# Allegro board democ2.brd
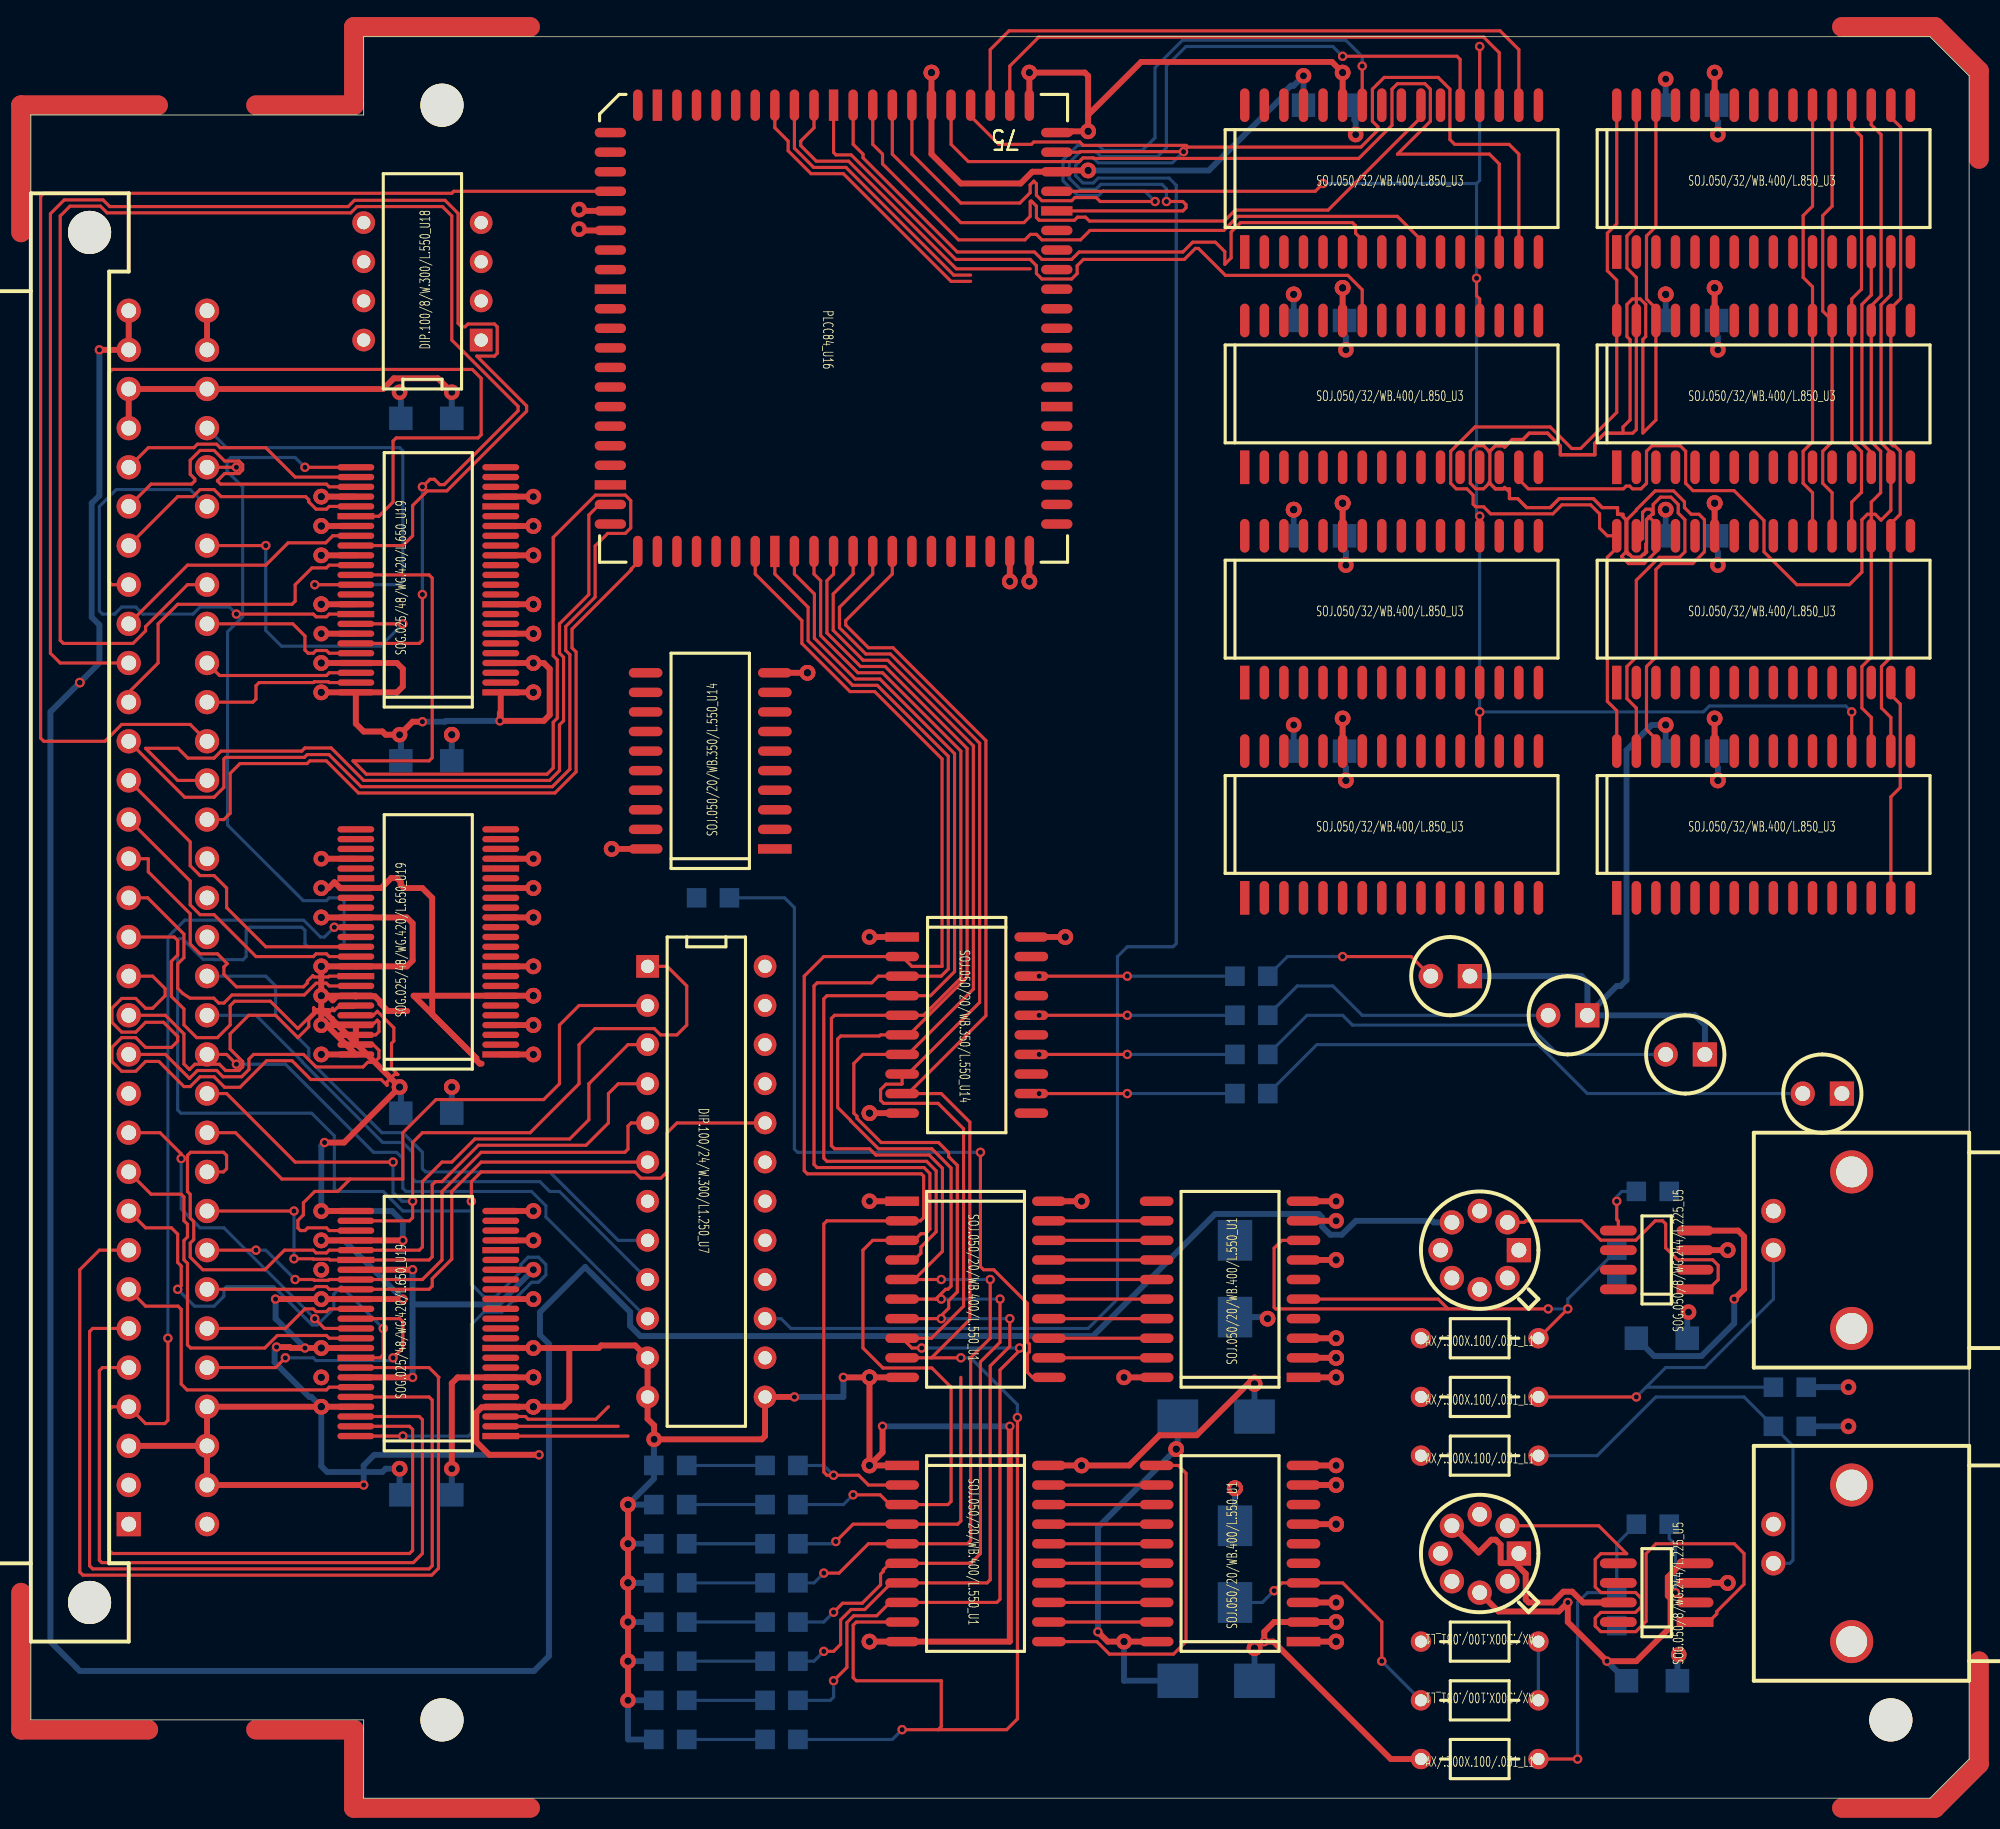
[diagram p0: board, top side]
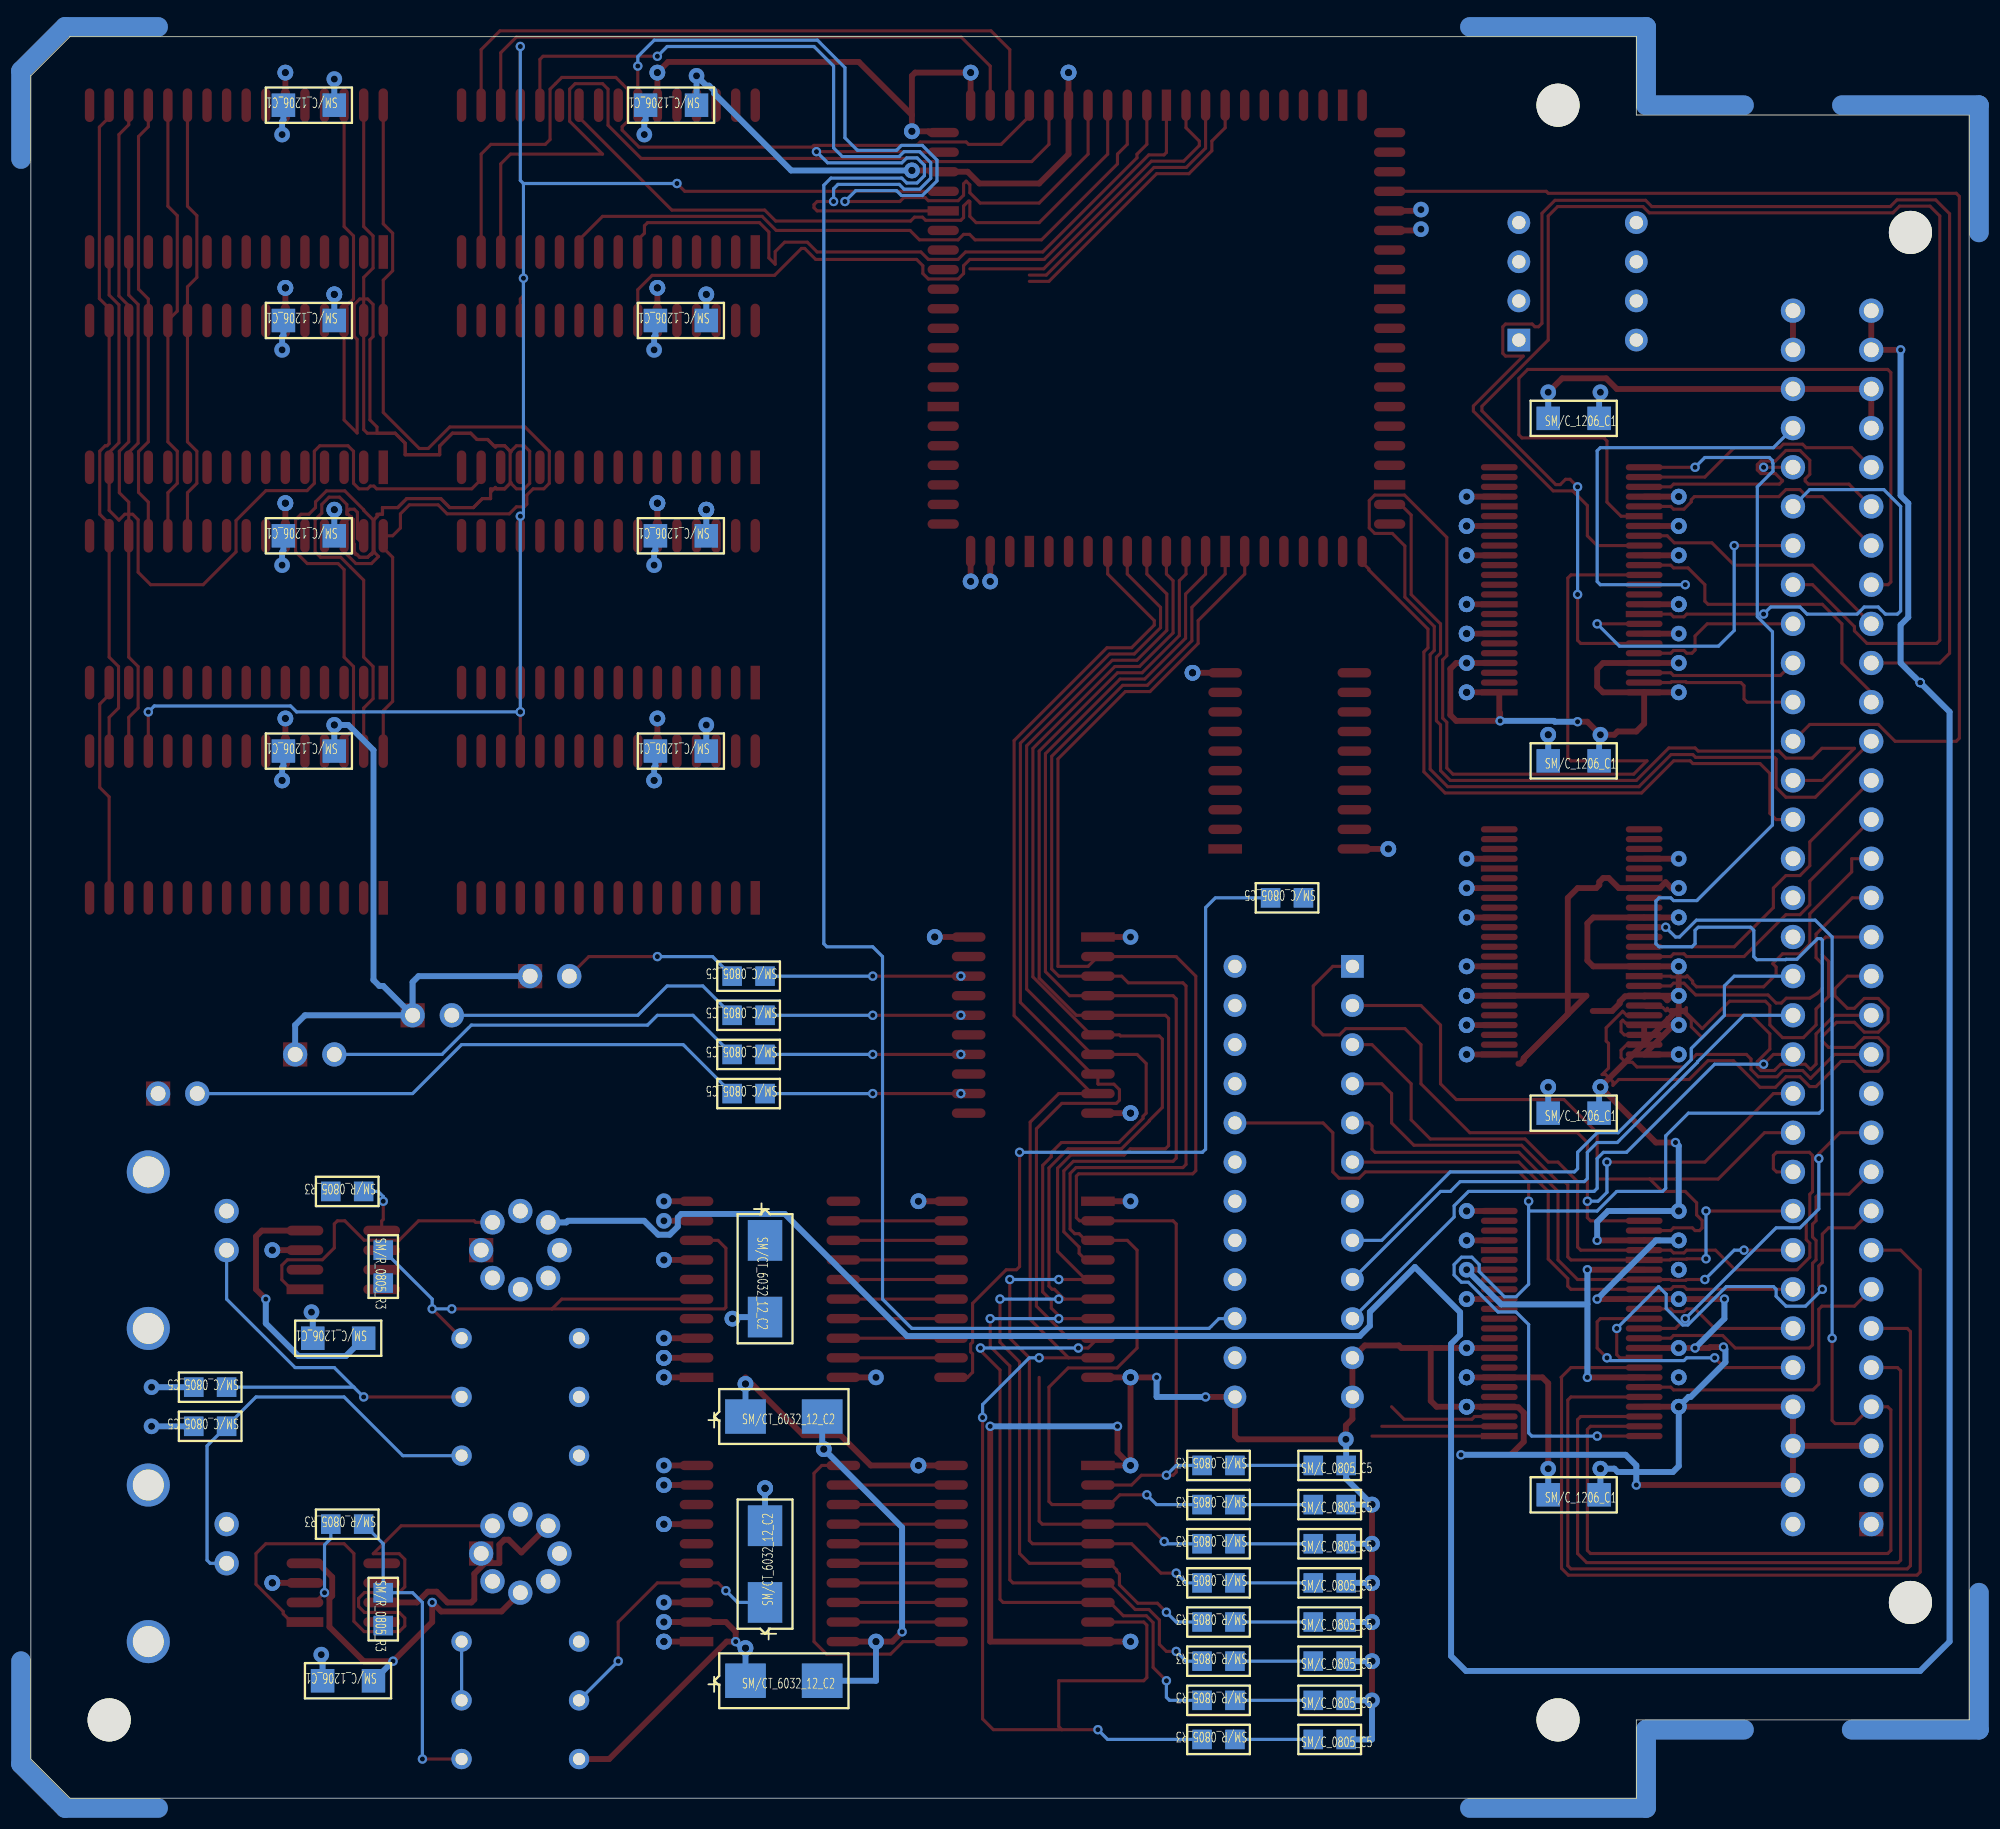
[diagram p1: board, bottom side, seen from below]

Outline 125.73 x 114.3 mm; copper layers: TOP, GND, POWER, BOTTOM. Coordinates in mm from the lower left corner of the outline.
Outline path: 0,109.22 21.59,109.22 21.59,114.3 123.19,114.3 125.73,111.76 125.73,2.54 123.19,0 21.59,0 21.59,5.08 0,5.08 0,109.22

## Design rules (mm)
nets with their own width: min track width 0.203; nets A0 A1 A2 A3 A4 A5 A6 A7 A8 A9 A10 A11 A12 A13 A14 A15 A16 A17 A18 A19 A20 A21 A22 A23 AEN/ BA0 BA1 BA2 BA3 BD0 BD1 BD2 BD3 BD4 BD5 BD6 BD7 BD8 BD9 BD10 BD11 BD12 BD13 BD14 BD15 BRD/ BRESET BWR/ D0 D1 D2 D3 D4 D5 D6 D7 D9 D10 D11 D12 D13 D14 D15 DDIR DEN/ DHEN/ FPGA/ GAIN HS/ MCLK MRD/ MWR/ N00036 N00036_6360 N00038 N00038_6372 N00044 N00044_6366 N00046 N00046_6362 N00048 N00048_6359 N00060 N00060_6368 N00306 N00318 N00322 N00671 N00689 N00703 N00717 N00827 N00831 N00835 N00837 N04966 N05690 N05692 N05694 N05696 N05698 N05700 N05702 N05704 N11940 N11950 N11984 N11994 N12004 N19706 N19710 N19714 N19718 N19934 N19938 N19942 N23417 N23878 N24816 N24821 N24826 N84247 N103899 N255822 N314771 N315146 N315333 N320476 N336036 N336041 OUTA OUTC RA0 RA1 RA2 RA3 RA4 RA5 RA6 RA7 RA8 RA9 RA10 RA11 RA12 RA13 RA14 RA15 RD0 RD1 RD2 RD3 RD4 RD5 RD6 RD7 RDY/ RESET/ SEL VCLKA VCLKC VD0 VD1 VD2 VD3 VD4 VD5 VD6 VD7 WAIT/ WSTAT/
nets with their own width: min track width 0.381; nets AGND GND GND_EARTH V12N V+12 VCC

## Placement (name value [footprint] x y rotation side)
C1  .1UF  [SMC1206]  104.14 29.84 0 bottom
C2  .1UF  [SMCT603212]  79.38 24.77 180 bottom
C3  .1UF  [SMCT603212]  79.38 7.62 180 bottom
C4  .1UF  [SMC1206]  106.05 109.86 0 bottom
C5  3300  [SMC0805]  42.55 6.35 180 bottom
C6  .1UF  [SMC1206]  103.51 7.62 0 bottom
C7  3300  [SMC0805]  42.55 21.59 180 bottom
C8  3300  [SMC0805]  42.55 8.89 180 bottom
C9  .1UF  [SMC1206]  27.3 89.53 180 bottom
C10  .1UF  [SMC1206]  27.3 67.31 180 bottom
C11  .1UF  [SMC1206]  27.3 44.45 180 bottom
C12  .1UF  [SMC1206]  106.05 81.91 0 bottom
C13  .1UF  [SMC1206]  106.05 95.89 0 bottom
C14  .1UF  [SMC1206]  106.05 67.95 0 bottom
C15  .1UF  [SMC1206]  27.3 19.69 180 bottom
C16  3300  [SMC0805]  42.55 11.43 180 bottom
C17  3300  [SMC0805]  42.55 13.97 180 bottom
C18  47PF  [SMC0805]  113.03 26.67 0 bottom
C19  3300  [SMC0805]  42.55 3.81 180 bottom
C20  3300  [SMC0805]  42.55 16.51 180 bottom
C21  .1UF  [SMCT603212]  78.11 12.7 90 bottom
C22  .1UF  [SMCT603212]  78.11 36.2 270 bottom
C23  47PF  [SMC0805]  113.03 24.13 0 bottom
C24  3300  [SMC0805]  42.55 19.05 180 bottom
C25  .1UF  [SMC1206]  82.55 109.86 0 bottom
C26  .1UF  [SMC1206]  81.92 95.89 0 bottom
C27  .1UF  [SMC1206]  81.92 81.91 0 bottom
C28  .1UF  [SMC1206]  81.92 67.95 0 bottom
D1  DIODE PHOTO EMIT  [LED]  100.97 50.8 180 top
D2  DIODE PHOTO EMIT  [LED]  93.34 53.34 180 top
D3  DIODE PHOTO EMIT  [LED]  108.59 48.26 180 top
D4  DIODE PHOTO EMIT  [LED]  117.48 45.72 180 top
J1  CON PAD  [DIN64P]  6.35 17.78 90 top
J2  CHANNEL 1  [BNC2P]  113.03 15.24 270 top
J3  CHANNEL 2  [BNC2P]  113.03 35.56 270 top
L1  50  [AX300X100031]  90.17 22.23 0 top
L2  50  [AX300X100031]  90.17 29.84 0 top
L3  50  [AX300X100031]  97.79 6.35 180 top
L4  50  [AX300X100031]  90.17 26.03 0 top
L5  50  [AX300X100031]  97.79 10.16 180 top
L6  50  [AX300X100031]  90.17 2.54 0 top
MTH1  -  [MTHOLE1]  26.67 109.86 0 top
MTH2  -  [MTHOLE1]  26.67 5.08 0 top
MTH3  -  [MTHOLE1]  120.65 5.08 0 top
R1  150  [SMC0805]  78.11 53.34 0 bottom
R2  150  [SMC0805]  78.11 50.8 0 bottom
R3  100  [SMR0805]  104.14 17.78 0 bottom
R4  100  [SMR0805]  102.87 13.34 270 bottom
R5  100  [SMR0805]  102.87 35.56 270 bottom
R6  100  [SMR0805]  104.14 39.37 0 bottom
R7  50  [SMR0805]  47.62 21.59 0 bottom
R8  50  [SMR0805]  47.62 8.89 0 bottom
R9  50  [SMR0805]  47.62 11.43 0 bottom
R10  50  [SMR0805]  47.62 6.35 0 bottom
R11  50  [SMC0805]  43.18 58.42 0 bottom
R12  150  [SMC0805]  78.11 45.72 0 bottom
R13  50  [SMR0805]  47.62 19.05 0 bottom
R14  50  [SMR0805]  47.62 16.51 0 bottom
R15  50  [SMR0805]  47.62 13.97 0 bottom
R16  50  [SMR0805]  47.62 3.81 0 bottom
R17  150  [SMC0805]  78.11 48.26 0 bottom
U1  TLC5602A  [SOJ05020WB400L550]  82.55 10.16 90 top
U2  TLC5602A  [SOJ05020WB400L550]  82.55 27.3 90 top
U3  TC55B4257J  [SOJ05032WB400L850]  102.87 86.36 0 top
U4  TC55B4257J  [SOJ05032WB400L850]  102.87 100.33 0 top
U5  DG419A  [SOG0508WG244L225]  107.95 33.02 90 top
U6  DG419A  [SOG0508WG244L225]  107.95 11.43 90 top
U7  20L10  [DIP10024W300L1250]  40 53.98 270 top
U8  TC55B4257J  [SOJ05032WB400L850]  78.74 72.39 0 top
U9  TC55B4257J  [SOJ05032WB400L850]  78.74 100.33 0 top
U10  TC55B4257J  [SOJ05032WB400L850]  102.87 72.39 0 top
U11  TC55B4257J  [SOJ05032WB400L850]  102.87 58.42 0 top
U12  TC55B4257J  [SOJ05032WB400L850]  78.74 58.42 0 top
U13  TC55B4257J  [SOJ05032WB400L850]  78.74 86.36 0 top
U14  ACT574  [SOJ05020WB350L550]  56.52 55.88 270 top
U15  ACT574  [SOJ05020WB400L550]  56.52 21.59 270 top
U16  EPF8282  [PLCC84]  52.07 109.86 270 top
U17  ACT574  [SOJ05020WB400L550]  56.52 38.73 270 top
U18  EPC1064  [DIP1008W300L550]  29.21 94.61 90 top
U19  FCT16245  [SOG02548WG420L650]  30.48 71.75 90 top
U20  FCT16245  [SOG02548WG420L650]  30.48 23.49 90 top
U21  FCT16245  [SOG02548WG420L650]  30.48 48.26 90 top
U22  TLE2037A  [TO-99]  96.52 35.56 90 top
U23  TLE2037A  [TO-99]  96.52 15.88 90 top
U25  74ACT574  [SOJ05020WB350L550]  48.26 61.59 90 top

## Library data of the parts
C1-C3 C5-C8 C16 C17 C19-C22 C24 = CAP: alternate symbols: (SMCT603212;SMC0805)
C4 C9-C15 C25-C28 = CAP_NP
C18 C23 = CAPACITOR
D1-D4 = DIODE_PHOTO_EMIT
J1 = 64CONSEPPINS
J2 J3 = BNC
L1-L6 = INDUCTOR
MTH1-MTH3 = MTHOLE1
R1-R17 = R: alternate symbols: (SMR0805)
U1 U2 = TLC5602A
U3 U4 U8-U13 = TC56B4257J
U5 U6 = DG419A
U7 = 20L10
U14 U15 U17 = ACT574: alternate symbols: (SOJ05020WB400L550)
U16 = FPGA_0
U18 = EPC1064
U19-U21 = FCT16245
U22 U23 = TLE2037A
U25 = 74ACT574

## Footprints (pads in the part's own frame, mm; a bottom-side part is the same pattern mirrored in y, then rotated)
AX300X100031
  round 1.321 hole 0.787: 1(0,0) 2(7.62,0)
BNC2P
  round 1.575 hole 0.965: 1(0,0) 2(-2.54,0)
  round 2.794 hole 2.007: 3(5.08,5.08) 4(-5.08,5.08)
DIN64P
  rect 1.575x1.575 hole 0.965: 1(0,0)
  round 1.575 hole 0.965: 2(2.54,0) 3(5.08,0) 4(7.62,0) 5(10.16,0) 6(12.7,0) 7(15.24,0) 8(17.78,0) 9(20.32,0) 10(22.86,0) 11(25.4,0) 12(27.94,0) 13(30.48,0) 14(33.02,0) 15(35.56,0) 16(38.1,0) 17(40.64,0) 18(43.18,0) 19(45.72,0) 20(48.26,0) 21(50.8,0) 22(53.34,0) 23(55.88,0) 24(58.42,0) 25(60.96,0) 26(63.5,0) 27(66.04,0) 28(68.58,0) 29(71.12,0) 30(73.66,0) 31(76.2,0) 32(78.74,0) 33(0,-5.08) 34(2.54,-5.08) 35(5.08,-5.08) 36(7.62,-5.08) 37(10.16,-5.08) 38(12.7,-5.08) 39(15.24,-5.08) 40(17.78,-5.08) 41(20.32,-5.08) 42(22.86,-5.08) 43(25.4,-5.08) 44(27.94,-5.08) 45(30.48,-5.08) 46(33.02,-5.08) 47(35.56,-5.08) 48(38.1,-5.08) 49(40.64,-5.08) 50(43.18,-5.08) 51(45.72,-5.08) 52(48.26,-5.08) 53(50.8,-5.08) 54(53.34,-5.08) 55(55.88,-5.08) 56(58.42,-5.08) 57(60.96,-5.08) 58(63.5,-5.08) 59(66.04,-5.08) 60(68.58,-5.08) 61(71.12,-5.08) 62(73.66,-5.08) 63(76.2,-5.08) 64(78.74,-5.08)
  round 2.794 hole 2.794: 65(83.82,2.54) 66(-5.08,2.54)
DIP1008W300L550
  rect 1.473x1.473 hole 0.864: 1(0,0)
  round 1.473 hole 0.864: 2(2.54,0) 3(5.08,0) 4(7.62,0) 5(7.62,7.62) 6(5.08,7.62) 7(2.54,7.62) 8(0,7.62)
DIP10024W300L1250
  rect 1.473x1.473 hole 0.864: 1(0,0)
  round 1.473 hole 0.864: 2(2.54,0) 3(5.08,0) 4(7.62,0) 5(10.16,0) 6(12.7,0) 7(15.24,0) 8(17.78,0) 9(20.32,0) 10(22.86,0) 11(25.4,0) 12(27.94,0) 13(27.94,7.62) 14(25.4,7.62) 15(22.86,7.62) 16(20.32,7.62) 17(17.78,7.62) 18(15.24,7.62) 19(12.7,7.62) 20(10.16,7.62) 21(7.62,7.62) 22(5.08,7.62) 23(2.54,7.62) 24(0,7.62)
LED
  rect 1.575x1.575 hole 0.965: 1(0,0)
  round 1.575 hole 0.965: 2(2.54,0)
MTHOLE1
  round 2.794 hole 2.794: 1(0,0)
PLCC84
  rect 2.032x0.61 smd: 1(0,0) 10(0,-11.43) 40(28.956,-3.81) 50(28.956,8.89)
  oval 2.032x0.61 smd: 2(0,-1.27) 3(0,-2.54) 4(0,-3.81) 5(0,-5.08) 6(0,-6.35) 7(0,-7.62) 8(0,-8.89) 9(0,-10.16) 11(0,-12.7) 33(28.956,-12.7) 34(28.956,-11.43) 35(28.956,-10.16) 36(28.956,-8.89) 37(28.956,-7.62) 38(28.956,-6.35) 39(28.956,-5.08) 41(28.956,-2.54) 42(28.956,-1.27) 43(28.956,0) 44(28.956,1.27) 45(28.956,2.54) 46(28.956,3.81) 47(28.956,5.08) 48(28.956,6.35) 49(28.956,7.62) 51(28.956,10.16) 52(28.956,11.43) 53(28.956,12.7) 75(0,12.7) 76(0,11.43) 77(0,10.16) 78(0,8.89) 79(0,7.62) 80(0,6.35) 81(0,5.08) 82(0,3.81) 83(0,2.54) 84(0,1.27)
  oval 0.61x2.032 smd: 12(1.778,-14.478) 13(3.048,-14.478) 14(4.318,-14.478) 15(5.588,-14.478) 16(6.858,-14.478) 17(8.128,-14.478) 18(9.398,-14.478) 19(10.668,-14.478) 21(13.208,-14.478) 22(14.478,-14.478) 23(15.748,-14.478) 24(17.018,-14.478) 25(18.288,-14.478) 26(19.558,-14.478) 27(20.828,-14.478) 28(22.098,-14.478) 29(23.368,-14.478) 31(25.908,-14.478) 32(27.178,-14.478) 54(27.178,14.478) 55(25.908,14.478) 56(24.638,14.478) 57(23.368,14.478) 58(22.098,14.478) 59(20.828,14.478) 61(18.288,14.478) 62(17.018,14.478) 63(15.748,14.478) 64(14.478,14.478) 65(13.208,14.478) 66(11.938,14.478) 67(10.668,14.478) 68(9.398,14.478) 69(8.128,14.478) 71(5.588,14.478) 72(4.318,14.478) 73(3.048,14.478) 74(1.778,14.478)
  rect 0.61x2.032 smd: 20(11.938,-14.478) 30(24.638,-14.478) 60(19.558,14.478) 70(6.858,14.478)
SMC0805
  rect 1.27x1.27 smd: 1(0,0) 2(2.134,0)
SMC1206
  rect 1.524x1.524 smd: 1(0,0) 2(3.302,0)
SMCT603212
  rect 2.642x2.235 smd: 1(0,0) 2(4.978,0)
SMR0805
  rect 1.27x1.27 smd: 1(0,0) 2(2.134,0)
SOG0508WG244L225
  rect 0.635x2.388 smd: 1(0,0)
  oval 0.635x2.388 smd: 2(1.27,0) 3(2.54,0) 4(3.81,0) 5(3.81,4.978) 6(2.54,4.978) 7(1.27,4.978) 8(0,4.978)
SOG02548WG420L650
  rect 0.406x2.388 smd: 1(0,0) 10(5.715,0) 20(12.065,0) 30(11.43,9.398) 40(5.08,9.398)
  oval 0.406x2.388 smd: 2(0.635,0) 3(1.27,0) 4(1.905,0) 5(2.54,0) 6(3.175,0) 7(3.81,0) 8(4.445,0) 9(5.08,0) 11(6.35,0) 12(6.985,0) 13(7.62,0) 14(8.255,0) 15(8.89,0) 16(9.525,0) 17(10.16,0) 18(10.795,0) 19(11.43,0) 21(12.7,0) 22(13.335,0) 23(13.97,0) 24(14.605,0) 25(14.605,9.398) 26(13.97,9.398) 27(13.335,9.398) 28(12.7,9.398) 29(12.065,9.398) 31(10.795,9.398) 32(10.16,9.398) 33(9.525,9.398) 34(8.89,9.398) 35(8.255,9.398) 36(7.62,9.398) 37(6.985,9.398) 38(6.35,9.398) 39(5.715,9.398) 41(4.445,9.398) 42(3.81,9.398) 43(3.175,9.398) 44(2.54,9.398) 45(1.905,9.398) 46(1.27,9.398) 47(0.635,9.398) 48(0,9.398)
SOJ05020WB350L550
  rect 0.61x2.184 smd: 1(0,0)
  oval 0.61x2.184 smd: 2(1.27,0) 3(2.54,0) 4(3.81,0) 5(5.08,0) 6(6.35,0) 7(7.62,0) 8(8.89,0) 9(10.16,0) 10(11.43,0) 11(11.43,8.382) 12(10.16,8.382) 13(8.89,8.382) 14(7.62,8.382) 15(6.35,8.382) 16(5.08,8.382) 17(3.81,8.382) 18(2.54,8.382) 19(1.27,8.382) 20(0,8.382)
SOJ05020WB400L550
  rect 0.61x2.184 smd: 1(0,0)
  oval 0.61x2.184 smd: 2(1.27,0) 3(2.54,0) 4(3.81,0) 5(5.08,0) 6(6.35,0) 7(7.62,0) 8(8.89,0) 9(10.16,0) 10(11.43,0) 11(11.43,9.525) 12(10.16,9.525) 13(8.89,9.525) 14(7.62,9.525) 15(6.35,9.525) 16(5.08,9.525) 17(3.81,9.525) 18(2.54,9.525) 19(1.27,9.525) 20(0,9.525)
SOJ05032WB400L850
  rect 0.61x2.184 smd: 1(0,0)
  oval 0.61x2.184 smd: 2(1.27,0) 3(2.54,0) 4(3.81,0) 5(5.08,0) 6(6.35,0) 7(7.62,0) 8(8.89,0) 9(10.16,0) 10(11.43,0) 11(12.7,0) 12(13.97,0) 13(15.24,0) 14(16.51,0) 15(17.78,0) 16(19.05,0) 17(19.05,9.525) 18(17.78,9.525) 19(16.51,9.525) 20(15.24,9.525) 21(13.97,9.525) 22(12.7,9.525) 23(11.43,9.525) 24(10.16,9.525) 25(8.89,9.525) 26(7.62,9.525) 27(6.35,9.525) 28(5.08,9.525) 29(3.81,9.525) 30(2.54,9.525) 31(1.27,9.525) 32(0,9.525)
TO-99
  rect 1.575x1.575 hole 0.965: 1(0,0)
  round 1.575 hole 0.965: 2(1.803,0.737) 3(2.54,2.54) 4(1.803,4.343) 5(0,5.08) 6(-1.803,4.343) 7(-2.54,2.54) 8(-1.803,0.737)

## Nets
AGND: C1.2(TP-2) C6.2(TP-2) C21.2(TP-2) C22.2(TP-2) J1.1(TP-1) J1.2(TP-2) J1.33(TP-33) U1.3(TP-3) U1.7(TP-7) U1.10(TP-10) U2.3(TP-3) U2.7(TP-7) U2.10(TP-10) U5.3(TP-3) U6.3(TP-3)
GND: C2.2(TP-2) C3.2(TP-2) C4.2(TP-2) C5.2(TP-2) C7.2(TP-2) C8.2(TP-2) C9.2(TP-2) C10.2(TP-2) C11.2(TP-2) C12.2(TP-2) C13.2(TP-2) C14.2(TP-2) C15.2(TP-2) C16.2(TP-2) C17.2(TP-2) C19.2(TP-2) C20.2(TP-2) C24.2(TP-2) C25.2(TP-2) C26.2(TP-2) C27.2(TP-2) C28.2(TP-2) J1.3(TP-3) J1.34(TP-34) J1.35(TP-35) J1.36(TP-36) U1.1(TP-1) U1.20(TP-20) U2.1(TP-1) U2.20(TP-20) U3.27(TP-27) U4.27(TP-27) U7.11(TP-11) U7.12(TP-12) U7.13(TP-13) U8.27(TP-27) U9.27(TP-27) U10.27(TP-27) U11.27(TP-27) U12.27(TP-27) U13.27(TP-27) U14.1(TP-1) U14.10(TP-10) U15.1(TP-1) U15.10(TP-10) U16.17(TP-17) U16.53(TP-53) U16.74(TP-74) U16.75(TP-75) U17.1(TP-1) U17.10(TP-10) U19.1(TP-1) U19.4(TP-4) U19.10(TP-10) U19.15(TP-15) U19.21(TP-21) U19.28(TP-28) U19.34(TP-34) U19.39(TP-39) U19.45(TP-45) U19.48(TP-48) U20.4(TP-4) U20.10(TP-10) U20.15(TP-15) U20.21(TP-21) U20.24(TP-24) U20.25(TP-25) U20.28(TP-28) U20.34(TP-34) U20.39(TP-39) U20.45(TP-45) U21.1(TP-1) U21.4(TP-4) U21.10(TP-10) U21.15(TP-15) U21.21(TP-21) U21.28(TP-28) U21.34(TP-34) U21.39(TP-39) U21.45(TP-45) U21.48(TP-48) U25.10(TP-10)
GND_EARTH: C18.2(TP-2) C23.2(TP-2) J2.2(TP-2) J3.2(TP-2)
V12N: J1.31(TP-31) J1.32(TP-32) U5.7(TP-7) U6.7(TP-7) U22.4(TP-4) U23.4(TP-4)
VCC: C2.1(TP-1) C3.1(TP-1) C4.1(TP-1) C9.1(TP-1) C10.1(TP-1) C11.1(TP-1) C12.1(TP-1) C13.1(TP-1) C14.1(TP-1) C15.1(TP-1) C25.1(TP-1) C26.1(TP-1) C27.1(TP-1) C28.1(TP-1) D1.1(TP-1) D2.1(TP-1) D3.1(TP-1) D4.1(TP-1) J1.29(TP-29) J1.30(TP-30) J1.62(TP-62) L2.1(TP-1) L6.1(TP-1) U1.2(TP-2) U1.9(TP-9) U2.2(TP-2) U2.9(TP-9) U7.24(TP-24) U14.20(TP-20) U15.20(TP-20) U16.16(TP-16) U16.52(TP-52) U16.72(TP-72) U16.80(TP-80) U17.20(TP-20) U19.7(TP-7) U19.18(TP-18) U19.31(TP-31) U19.42(TP-42) U20.7(TP-7) U20.18(TP-18) U20.31(TP-31) U20.42(TP-42) U21.7(TP-7) U21.18(TP-18) U21.31(TP-31) U21.42(TP-42) U25.20(TP-20)
A0: J1.54(TP-54) U19.47(TP-47)
A1: J1.55(TP-55) U19.46(TP-46)
A2: J1.56(TP-56) U19.44(TP-44)
A3: J1.57(TP-57) U19.43(TP-43)
A4: J1.58(TP-58) U19.41(TP-41)
A5: J1.59(TP-59) U19.40(TP-40)
A6: J1.60(TP-60) U19.38(TP-38)
A7: J1.61(TP-61) U19.37(TP-37)
A8: J1.13(TP-13) U21.47(TP-47)
A9: J1.14(TP-14) U21.46(TP-46)
A10: J1.15(TP-15) U21.44(TP-44)
A11: J1.16(TP-16) U21.43(TP-43)
A12: J1.17(TP-17) U21.41(TP-41)
A13: J1.18(TP-18) U21.40(TP-40)
A14: J1.19(TP-19) U21.38(TP-38)
A15: J1.20(TP-20) U21.37(TP-37)
A16: J1.37(TP-37) U20.36(TP-36)
A17: J1.38(TP-38) U20.35(TP-35)
A18: J1.39(TP-39) U7.6(TP-6) U20.33(TP-33)
A19: J1.40(TP-40) U7.5(TP-5) U20.32(TP-32)
A20: J1.41(TP-41) U7.4(TP-4) U20.30(TP-30)
A21: J1.42(TP-42) U7.3(TP-3) U20.29(TP-29)
A22: J1.43(TP-43) U7.2(TP-2) U20.27(TP-27)
A23: J1.44(TP-44) U7.1(TP-1) U20.26(TP-26)
AEN/: J1.47(TP-47) U7.8(TP-8)
BA0: U16.6(TP-6) U19.2(TP-2) U20.13(TP-13) U21.2(TP-2)
BA1: U16.7(TP-7) U19.3(TP-3) U20.14(TP-14) U21.3(TP-3)
BA2: U16.8(TP-8) U19.5(TP-5) U20.16(TP-16) U21.5(TP-5)
BA3: U16.9(TP-9) U19.6(TP-6) U20.17(TP-17) U21.6(TP-6)
BD0: U16.25(TP-25) U19.13(TP-13)
BD1: U16.24(TP-24) U19.14(TP-14)
BD2: U16.23(TP-23) U19.16(TP-16)
BD3: U16.22(TP-22) U19.17(TP-17)
BD4: U16.21(TP-21) U19.19(TP-19)
BD5: U16.20(TP-20) U19.20(TP-20)
BD6: U16.19(TP-19) U19.22(TP-22)
BD7: U16.18(TP-18) U19.23(TP-23)
BD8: U20.2(TP-2) U21.23(TP-23)
BD9: U20.3(TP-3) U21.22(TP-22)
BD10: U20.5(TP-5) U21.20(TP-20)
BD11: U20.6(TP-6) U21.19(TP-19)
BD12: U20.8(TP-8) U21.17(TP-17)
BD13: U20.9(TP-9) U21.16(TP-16)
BD14: U20.11(TP-11) U21.14(TP-14)
BD15: U20.12(TP-12) U21.13(TP-13)
BRD/: U7.15(TP-15) U16.73(TP-73)
BRESET: U7.14(TP-14) U16.12(TP-12)
BWR/: U7.16(TP-16) U16.54(TP-54)
D0: J1.28(TP-28) U19.26(TP-26) U21.26(TP-26)
D1: J1.27(TP-27) U19.27(TP-27) U21.27(TP-27)
D2: J1.26(TP-26) U19.29(TP-29) U21.29(TP-29)
D3: J1.25(TP-25) U19.30(TP-30) U21.30(TP-30)
D4: J1.24(TP-24) U19.32(TP-32) U21.32(TP-32)
D5: J1.23(TP-23) U19.33(TP-33) U21.33(TP-33)
D6: J1.4(TP-4) J1.22(TP-22) U19.35(TP-35) U20.47(TP-47) U21.35(TP-35)
D7: J1.21(TP-21) U19.36(TP-36) U21.36(TP-36)
D9: J1.5(TP-5) U20.46(TP-46)
D10: J1.6(TP-6) U20.44(TP-44)
D11: J1.7(TP-7) U20.43(TP-43)
D12: J1.8(TP-8) U20.41(TP-41)
D13: J1.9(TP-9) U20.40(TP-40)
D14: J1.10(TP-10) U20.38(TP-38)
D15: J1.11(TP-11) U20.37(TP-37)
DDIR: U7.19(TP-19) U19.24(TP-24) U20.1(TP-1) U21.24(TP-24)
DEN/: U7.20(TP-20) U19.25(TP-25) U20.48(TP-48)
DHEN/: U7.21(TP-21) U21.25(TP-25)
FPGA/: U7.17(TP-17) U16.30(TP-30)
GAIN: U5.6(TP-6) U6.6(TP-6) U16.28(TP-28)
HS/: U7.18(TP-18) U16.29(TP-29)
MCLK: J1.52(TP-52) U16.31(TP-31)
MRD/: J1.46(TP-46) U7.9(TP-9)
MWR/: J1.45(TP-45) U7.10(TP-10)
N00036_6360: L6.2(TP-2) R3.1(TP-1) R4.1(TP-1) U1.5(TP-5) U1.8(TP-8) U6.5(TP-5)
N00038_6372: C21.1(TP-1) L3.2(TP-2) U1.4(TP-4)
N00044_6366: U6.1(TP-1) U23.2(TP-2)
N00046_6362: R4.2(TP-2) U6.8(TP-8)
N00048_6359: R3.2(TP-2) U6.2(TP-2)
N00060_6368: U1.6(TP-6) U23.3(TP-3)
OUTA: L1.1(TP-1) U23.6(TP-6)
OUTC: L4.1(TP-1) U22.6(TP-6)
RA0: U3.5(TP-5) U4.5(TP-5) U8.5(TP-5) U9.5(TP-5) U10.5(TP-5) U11.5(TP-5) U12.5(TP-5) U13.5(TP-5) U16.58(TP-58)
RA1: U3.4(TP-4) U4.4(TP-4) U8.4(TP-4) U9.4(TP-4) U10.4(TP-4) U11.4(TP-4) U12.4(TP-4) U13.4(TP-4) U16.60(TP-60)
RA2: U3.3(TP-3) U4.3(TP-3) U8.3(TP-3) U9.3(TP-3) U10.3(TP-3) U11.3(TP-3) U12.3(TP-3) U13.3(TP-3) U16.61(TP-61)
RA3: U3.2(TP-2) U4.2(TP-2) U8.2(TP-2) U9.2(TP-2) U10.2(TP-2) U11.2(TP-2) U12.2(TP-2) U13.2(TP-2) U16.62(TP-62)
RA4: U3.32(TP-32) U4.32(TP-32) U8.32(TP-32) U9.32(TP-32) U10.32(TP-32) U11.32(TP-32) U12.32(TP-32) U13.32(TP-32) U16.63(TP-63)
RA5: U3.31(TP-31) U4.31(TP-31) U8.31(TP-31) U9.31(TP-31) U10.31(TP-31) U11.31(TP-31) U12.31(TP-31) U13.31(TP-31) U16.64(TP-64)
RA6: U3.30(TP-30) U4.30(TP-30) U8.30(TP-30) U9.30(TP-30) U10.30(TP-30) U11.30(TP-30) U12.30(TP-30) U13.30(TP-30) U16.65(TP-65)
RA7: U3.29(TP-29) U4.29(TP-29) U8.29(TP-29) U9.29(TP-29) U10.29(TP-29) U11.29(TP-29) U12.29(TP-29) U13.29(TP-29) U16.66(TP-66)
RA8: U3.28(TP-28) U4.28(TP-28) U8.28(TP-28) U9.28(TP-28) U10.28(TP-28) U11.28(TP-28) U12.28(TP-28) U13.28(TP-28) U16.67(TP-67)
RA9: U3.22(TP-22) U4.22(TP-22) U8.22(TP-22) U9.22(TP-22) U10.22(TP-22) U11.22(TP-22) U12.22(TP-22) U13.22(TP-22) U16.69(TP-69)
RA10: U3.21(TP-21) U4.21(TP-21) U8.21(TP-21) U9.21(TP-21) U10.21(TP-21) U11.21(TP-21) U12.21(TP-21) U13.21(TP-21) U16.70(TP-70)
RA11: U3.20(TP-20) U4.20(TP-20) U8.20(TP-20) U9.20(TP-20) U10.20(TP-20) U11.20(TP-20) U12.20(TP-20) U13.20(TP-20) U16.71(TP-71)
RA12: U3.19(TP-19) U4.19(TP-19) U8.19(TP-19) U9.19(TP-19) U10.19(TP-19) U11.19(TP-19) U12.19(TP-19) U13.19(TP-19) U16.76(TP-76)
RA13: U3.18(TP-18) U4.18(TP-18) U8.18(TP-18) U9.18(TP-18) U10.18(TP-18) U11.18(TP-18) U12.18(TP-18) U13.18(TP-18) U16.77(TP-77)
RA14: U3.15(TP-15) U4.15(TP-15) U8.15(TP-15) U9.15(TP-15) U10.15(TP-15) U11.15(TP-15) U12.15(TP-15) U13.15(TP-15) U16.78(TP-78)
RA15: U3.14(TP-14) U4.14(TP-14) U8.14(TP-14) U9.14(TP-14) U10.14(TP-14) U11.14(TP-14) U12.14(TP-14) U13.14(TP-14) U16.79(TP-79)
RD0: U4.26(TP-26) U8.26(TP-26) U9.26(TP-26) U10.26(TP-26) U16.81(TP-81)
RD1: U4.23(TP-23) U8.23(TP-23) U9.23(TP-23) U10.23(TP-23) U16.82(TP-82)
RD2: U4.10(TP-10) U8.10(TP-10) U9.10(TP-10) U10.10(TP-10) U16.83(TP-83)
RD3: U4.7(TP-7) U8.7(TP-7) U9.7(TP-7) U10.7(TP-7) U16.84(TP-84)
RD4: U3.26(TP-26) U11.26(TP-26) U12.26(TP-26) U13.26(TP-26) U16.1(TP-1)
RD5: U3.23(TP-23) U11.23(TP-23) U12.23(TP-23) U13.23(TP-23) U16.2(TP-2)
RD6: U3.10(TP-10) U11.10(TP-10) U12.10(TP-10) U13.10(TP-10) U16.3(TP-3)
RD7: U3.7(TP-7) U11.7(TP-7) U12.7(TP-7) U13.7(TP-7) U16.4(TP-4)
RDY/: J1.50(TP-50) U7.22(TP-22)
RESET/: J1.53(TP-53) U16.15(TP-15)
SEL: U7.23(TP-23) U16.13(TP-13)
V+12: C1.1(TP-1) C6.1(TP-1) J1.63(TP-63) J1.64(TP-64) U5.4(TP-4) U6.4(TP-4) U22.7(TP-7) U23.7(TP-7)
VCLKA: U1.11(TP-11) U2.11(TP-11) U15.11(TP-11) U16.34(TP-34)
VCLKC: R11.2(TP-2) U17.11(TP-11)
VD0: R7.2(TP-2) U14.2(TP-2) U15.2(TP-2) U16.39(TP-39) U17.2(TP-2)
VD1: R13.2(TP-2) U14.3(TP-3) U15.3(TP-3) U16.40(TP-40) U17.3(TP-3)
VD2: R14.2(TP-2) U14.4(TP-4) U15.4(TP-4) U16.41(TP-41) U17.4(TP-4)
VD3: R15.2(TP-2) U14.5(TP-5) U15.5(TP-5) U16.42(TP-42) U17.5(TP-5)
VD4: R9.2(TP-2) U14.6(TP-6) U15.6(TP-6) U16.43(TP-43) U17.6(TP-6)
VD5: R8.2(TP-2) U14.7(TP-7) U15.7(TP-7) U16.44(TP-44) U17.7(TP-7)
VD6: R10.2(TP-2) U14.8(TP-8) U15.8(TP-8) U16.45(TP-45) U17.8(TP-8)
VD7: R16.2(TP-2) U14.9(TP-9) U15.9(TP-9) U16.46(TP-46) U17.9(TP-9)
WAIT/: J1.51(TP-51) U16.33(TP-33)
WSTAT/: U14.11(TP-11) U16.56(TP-56)
N00036: L2.2(TP-2) R5.1(TP-1) R6.1(TP-1) U2.5(TP-5) U2.8(TP-8) U5.5(TP-5)
N00038: C22.1(TP-1) L5.2(TP-2) U2.4(TP-4)
N00044: U5.1(TP-1) U22.2(TP-2)
N00046: R5.2(TP-2) U5.8(TP-8)
N00048: R6.2(TP-2) U5.2(TP-2)
N00060: U2.6(TP-6) U22.3(TP-3)
N00306: U1.12(TP-12) U15.19(TP-19)
N00318: U1.15(TP-15) U15.16(TP-16)
N00322: U1.16(TP-16) U15.15(TP-15)
N00671: C19.1(TP-1) R16.1(TP-1)
N00689: C5.1(TP-1) R10.1(TP-1)
N00703: C8.1(TP-1) R8.1(TP-1)
N00717: C16.1(TP-1) R9.1(TP-1)
N00827: C17.1(TP-1) R15.1(TP-1)
N00831: C20.1(TP-1) R14.1(TP-1)
N00835: C24.1(TP-1) R13.1(TP-1)
N00837: C7.1(TP-1) R7.1(TP-1)
N04966: L3.1(TP-1) L5.1(TP-1)
N05690: U2.12(TP-12) U17.19(TP-19)
N05692: U2.18(TP-18) U17.13(TP-13)
N05694: U2.13(TP-13) U17.18(TP-18)
N05696: U2.19(TP-19) U17.12(TP-12)
N05698: U2.17(TP-17) U17.14(TP-14)
N05700: U2.14(TP-14) U17.17(TP-17)
N05702: U2.15(TP-15) U17.16(TP-16)
N05704: U2.16(TP-16) U17.15(TP-15)
N11940: U1.13(TP-13) U15.18(TP-18)
N11950: U1.14(TP-14) U15.17(TP-17)
N11984: U1.17(TP-17) U15.14(TP-14)
N11994: U1.18(TP-18) U15.13(TP-13)
N12004: U1.19(TP-19) U15.12(TP-12)
N19706: R1.1(TP-1) U14.18(TP-18)
N19710: R2.1(TP-1) U14.16(TP-16)
N19714: R17.1(TP-1) U14.14(TP-14)
N19718: R12.1(TP-1) U14.12(TP-12)
N19934: D4.2(TP-2) R12.2(TP-2)
N19938: D3.2(TP-2) R17.2(TP-2)
N19942: D1.2(TP-2) R2.2(TP-2)
N23417: U10.6(TP-6) U13.6(TP-6) U16.48(TP-48)
N23878: R11.1(TP-1) U16.36(TP-36)
N24816: U16.14(TP-14) U18.1(TP-1)
N24821: U16.10(TP-10) U18.2(TP-2)
N24826: U16.11(TP-11) U18.3(TP-3) U18.4(TP-4)
N84247: U19.9(TP-9) U20.22(TP-22) U21.9(TP-9) U21.12(TP-12)
N103899: U19.8(TP-8) U19.12(TP-12) U20.19(TP-19) U20.23(TP-23) U21.8(TP-8) U21.11(TP-11)
N255822: D2.2(TP-2) R1.2(TP-2)
N314771: U3.6(TP-6) U4.6(TP-6) U16.51(TP-51)
N315146: U9.6(TP-6) U11.6(TP-6) U16.50(TP-50)
N315333: U8.6(TP-6) U12.6(TP-6) U16.49(TP-49)
N320476: U3.11(TP-11) U4.11(TP-11) U8.11(TP-11) U9.11(TP-11) U10.11(TP-11) U11.11(TP-11) U12.11(TP-11) U13.11(TP-11) U16.57(TP-57)
N336036: C23.1(TP-1) J2.1(TP-1) L1.2(TP-2)
N336041: C18.1(TP-1) J3.1(TP-1) L4.2(TP-2)

Pads without a net: J1 12 48 49 65 66; J2 3 4; J3 3 4; MTH1 1; MTH2 1; MTH3 1; U3 1 8 9 12 13 16 17 24 25; U4 1 8 9 12 13 16 17 24 25; U7 7; U8 1 8 9 12 13 16 17 24 25; U9 1 8 9 12 13 16 17 24 25; U10 1 8 9 12 13 16 17 24 25; U11 1 8 9 12 13 16 17 24 25; U12 1 8 9 12 13 16 17 24 25; U13 1 8 9 12 13 16 17 24 25; U14 13 15 17 19; U16 5 26 27 32 35 37 38 47 55 59 68; U18 5 6 7 8; U19 11; U20 20; U22 1 5 8; U23 1 5 8; U25 1 2 3 4 5 6 7 8 9 11 12 13 14 15 16 17 18 19

## Via types
v1: diameter 0.61, hole 0.33, TOP to BOTTOM, 100 vias
v2: diameter 1.016, hole 0.457, TOP to BOTTOM, 248 vias

## Routing (per net, layer and track width the routed paths; a pad name or vN(x,y) marks a point on that pad's centre or on a via; arc(x,y) is an arc through that point)
AGND: length 38.4
  TOP w0.381: U6.3 v2(110.07,13.97) ; v2(84.67,21.59) U1.10 ; v2(84.67,17.78) U1.7 ; 82.55,34.92 v2(84.67,34.92) ; U1.3 v2(84.67,12.7) ; U2.3 v2(84.67,29.84) ; v2(84.67,38.73) U2.10 ; v2(110.07,35.56) U5.3
  GND w0.381: 10.31,17.78 J1.33 ; J1.33 11.43,16.66 ; J1.33 12.55,17.78 ; J1.33 11.43,18.9 ; 5.23,20.32 J1.2 ; J1.2 6.35,19.2 ; J1.2 6.35,21.44 ; J1.2 7.47,20.32 ; J1.1 7.47,17.78 ; J1.1 5.23,17.78 ; J1.1 6.35,16.66 ; J1.1 6.35,18.9
  BOTTOM w0.381: C1.2 107.44,31.45 v2(107.53,31.54) ; v2(80.22,31.12) 80.12,31.22 C22.2 ; C6.2 106.81,9.23 v2(106.89,9.31) ; C21.2 v2(78.11,20.11)
GND: length 480.5
  TOP w0.381: U13.27 v2(85.09,98) ; U21.1 v2(32.6,48.26) ; U19.34 v2(18.84,80.64) ; U20.45 v2(18.84,25.4) J1.36 J1.35 ; v2(18.84,71.75) U19.48 ; U19.48 21.08,69.72 21.59,69.22 22.8,69.22 23.01,69 v2(23.92,69) 24.77,69.85 v1(25.4,69.85) ; U19.48 23.75,71.75 24.13,72.14 24.13,73.28 23.75,73.66 U19.45 v2(18.84,73.66) ; v1(52.7,27.3) v2(54.4,27.3) ; v2(54.4,27.3) v2(54.4,21.59) ; v2(54.4,27.3) U17.10 ; 68.58,109.22 v2(68.58,108.16) 67.51,108.16 67.42,108.08 U16.74 ; 68.58,109.22 72.02,112.66 84.4,112.66 v2(85.09,111.97) U9.27 ; 68.58,109.22 68.58,111.76 68.37,111.97 v2(64.77,111.97) U16.75 ; v2(50.38,73.02) U25.10 ; 21.08,48.98 v2(23.92,46.14) 20.32,42.55 v1(19.05,42.55) ; 21.08,48.98 U21.45 v2(18.84,50.16) ; 21.08,48.98 18.84,51.22 ; U14.1 v2(54.4,55.88) ; U12.27 v2(85.09,70.06) ; 34.92,29.21 34.92,25.78 34.54,25.4 v2(32.6,25.4) 31.69,25.4 ; 34.92,29.21 v2(32.6,29.21) U20.10 ; 34.92,29.21 36.83,29.21 37,29.38 39.2,29.38 U7.11 U7.12 40,24.61 40.43,24.19 v2(40.43,23.28) 47.41,23.28 47.62,23.49 U7.13 v1(49.53,26.03) ; U16.17 35.64,101.73 v2(35.56,101.81) ; v1(24.13,32.38) U20.34 v2(18.84,32.38) v1(15.88,32.38) ; 31.69,25.4 31.65,25.36 29.24,25.36 28.89,25.01 28.89,23.13 29.74,22.28 v1(32.96,22.28) ; 31.69,25.4 U20.4 ; v1(69.22,10.79) 69.85,10.16 v2(70.91,10.16) U1.20 ; 18.84,51.22 18.84,50.5 U21.48 v2(18.84,48.26) ; 18.84,51.22 v2(18.84,53.98) 24.38,53.98 24.77,54.36 24.77,56.77 24.38,57.15 U21.34 v2(18.84,57.15) ; v2(85.09,84.03) U8.27 ; v1(21.59,20.32) J1.34 J1.35 ; v2(38.73,6.35) v2(38.73,8.89) v2(38.73,11.43) v2(38.73,13.97) v2(38.73,16.51) v2(38.73,19.05) ; v2(54.4,21.59) U15.1 ; v2(54.4,21.59) 55.25,22.44 v1(55.25,24.13) ; v1(24.13,36.2) U20.28 v2(18.84,36.2) ; v2(32.6,77.47) U19.10 ; U21.28 v2(18.84,60.96) ; U19.28 v2(18.84,84.45) ; J1.35 J1.3 ; U2.20 v2(70.91,27.3) ; U20.21 v2(32.6,36.2) ; v2(32.6,84.45) U19.21 ; v1(30.42,69.91) 30.42,70.43 ; v1(30.42,69.91) 33.27,69.91 33.66,70.29 33.66,73.28 33.27,73.66 v2(32.6,73.66) U19.4 ; v1(30.42,69.91) 30.48,69.96 U19.1 v2(32.6,71.75) ; v2(32.6,50.16) U21.4 ; v2(109.22,70.06) U11.27 ; v2(54.4,38.73) U17.1 ; v2(54.4,10.16) U15.10 63.5,10.16 v1(63.5,24.13) ; v2(32.6,60.96) U21.21 ; v2(84.67,27.3) U2.1 ; v2(109.22,111.97) U4.27 ; U20.25 v1(18.84,38.1) ; U19.39 v2(18.84,77.47) ; v2(32.6,57.15) U21.15 ; v2(32.6,53.98) 30.48,53.98 ; U10.27 v2(109.22,84.03) ; U14.10 v2(54.4,44.45) ; U20.39 v2(18.84,29.21) v1(17.78,29.21) 16.86,29.21 16.8,29.27 v1(15.94,29.27) ; v2(109.22,98) U3.27 ; U20.24 v2(32.6,38.1) ; U1.1 v2(84.67,10.16) ; v2(32.6,80.64) U19.15 ; U20.15 v2(32.6,32.38) ; v2(64.77,78.95) U16.53
  GND w0.381: J1.36 11.43,26.52 ; J1.36 12.55,25.4 ; J1.36 11.43,24.28 ; J1.36 10.31,25.4 ; 10.31,22.86 J1.35 ; J1.35 11.43,21.74 ; J1.35 12.55,22.86 ; J1.35 11.43,23.98 ; U7.13 48.87,26.03 ; U7.13 46.38,26.03 ; U7.13 47.62,24.79 ; J1.34 11.43,21.44 ; J1.34 10.31,20.32 ; J1.34 12.55,20.32 ; U7.11 41.25,28.58 ; U7.11 38.76,28.58 ; U7.11 40,27.33 ; 40,24.79 U7.12 ; U7.12 40,27.28 ; U7.12 41.25,26.03 ; U7.12 38.76,26.03 ; J1.3 7.47,22.86 ; J1.3 5.23,22.86 ; J1.3 6.35,23.98
  BOTTOM w0.381: v2(38.73,11.43) C16.2 ; v2(23.92,91.23) 24,91.14 C9.2 ; v1(15.94,29.27) 15.81,29.15 15.81,28.29 18.06,26.04 18.2,26.04 v2(18.84,25.4) 18.84,21.55 19.22,21.17 22.8,21.17 23.01,21.38 v2(23.92,21.38) 23.92,19.77 C15.2 ; v2(38.73,13.97) C17.2 ; v1(30.42,69.91) 26.93,69.91 26.87,69.85 v1(25.4,69.85) ; C4.2 109.35,108.89 109.43,108.8 v2(109.43,107.95) ; C8.2 v2(38.73,8.89) ; C5.2 v2(38.73,6.35) 38.73,3.81 C19.2 ; C3.2 70.91,7.62 v2(70.91,10.16) ; v1(52.7,27.3) 52.7,26.03 v1(49.53,26.03) ; C24.2 v2(38.73,19.05) 40.41,20.73 C7.2 40.41,23.27 v2(40.43,23.28) ; v1(19.05,42.55) 18.84,42.33 v1(18.84,38.1) 23.43,38.1 24.13,37.4 v1(24.13,36.2) ; C25.2 85.85,108.89 85.94,108.8 v2(85.94,107.95) ; 85.22,95.89 85.22,94.92 85.3,94.83 v2(85.3,93.98) ; v1(15.88,32.38) 15.88,31.12 v1(17.78,29.21) ; 85.22,67.95 85.22,66.98 85.3,66.89 v2(85.3,66.04) ; v2(18.84,36.2) 20.32,36.2 v1(24.13,32.38) ; C20.2 v2(38.73,16.51) ; v2(109.43,66.04) 109.43,66.89 109.35,66.98 C14.2 ; v2(109.43,80.01) 109.43,80.86 109.35,80.95 C12.2 ; v2(85.3,80.01) 85.3,80.86 85.22,80.95 85.22,81.91 ; C11.2 24,46.06 v2(23.92,46.14) ; v2(109.43,93.98) 109.43,94.83 109.35,94.92 C13.2 ; v1(32.96,22.28) 22.28,22.28 21.59,21.59 v1(21.59,20.32) ; v2(23.92,69) 24,68.92 C10.2 ; C2.2 74.4,22.75 v2(74.3,22.65) 69.22,17.57 v1(69.22,10.79) ; v1(63.5,24.13) v1(55.25,24.13)
GND_EARTH: length 14.6
  GND w0.381: 113.03,16.63 J2.2 ; J2.2 111.88,17.78 ; J2.2 114.18,17.78 ; J2.2 113.03,18.93 ; 111.88,38.1 J3.2 ; J3.2 113.03,39.25 ; J3.2 114.18,38.1 ; J3.2 113.03,36.95
  BOTTOM w0.381: C18.2 v2(117.9,26.67) ; C23.2 v2(117.9,24.13)
V12N: length 229.2
  TOP w0.381: U6.7 100.68,12.7 99.98,13.4 99.41,13.4 98.71,12.7 97.16,12.7 96.96,12.89 96.96,14.56 96.27,15.25 95.34,15.25 95.34,16.45 95.02,16.77 94.74,16.77 93.91,15.94 U23.4 ; v1(4.44,93.98) J1.31 J1.32
  BOTTOM w0.381: U22.4 90.99,37.36 90.89,37.46 85.94,37.46 85.04,36.56 84.29,36.56 83.76,37.09 83.76,37.68 83.54,37.91 76.82,37.91 68.9,29.98 39.54,29.98 38.87,30.65 38.87,31.54 35.95,34.47 33.02,31.53 33.02,30.06 33.6,29.48 33.6,9.22 32.64,8.25 3.17,8.25 1.27,10.16 1.27,70.48 v1(3.17,72.39) 4.44,73.66 4.44,76.13 3.95,76.63 3.95,84.03 4.44,84.52 v1(4.44,93.98)
VCC: length 310.4
  TOP w0.381: L6.1 88.21,2.54 80.59,10.16 v1(80.01,10.16) 80.01,10.79 80.64,11.43 U1.2 v2(84.67,11.43) ; 79.38,27.3 75.62,23.55 73.21,23.55 71.25,21.59 v2(68.16,21.59) U15.20 ; 29.24,47.66 29.12,47.66 28.89,47.89 28.89,48.01 ; v2(35.56,103.08) 35.64,103 U16.16 ; U25.20 v2(37.68,61.59) ; U19.31 v2(18.84,82.55) ; U21.18 v2(32.6,59.05) ; U14.20 v2(67.1,55.88) ; v2(63.5,78.95) U16.52 ; v2(27.3,21.38) 27.3,26.92 27.69,27.3 U20.7 v2(32.6,27.3) ; 28.89,48.01 24.83,52.07 U21.7 v2(32.6,52.07) ; 28.89,48.01 28.89,48.01 26.04,50.87 26.04,58.42 25.4,59.05 24.19,59.05 23.99,59.26 23.99,59.46 23.74,59.71 23.38,59.71 22.73,59.05 U21.31 20.07,59.05 19.69,59.44 19.31,59.05 v2(18.84,59.05) ; v2(84.67,20.32) U1.9 ; 21.04,52.03 21.12,52.03 ; 21.04,52.03 19.84,52.03 19.58,51.77 19.28,52.06 19.25,52.03 19.25,52.06 19.09,52.22 19.09,52.07 ; 21.04,52.03 U21.42 21.12,52.03 ; 21.04,52.03 21.01,52.07 19.09,52.07 ; 21.12,52.03 22.32,52.03 22.67,51.68 22.67,51.57 23.16,51.08 24.42,51.08 ; 19.09,52.07 v2(18.84,52.07) ; v2(18.84,75.56) U19.42 ; v1(24.77,34.29) U20.31 ; v2(32.6,34.29) U20.18 ; U20.42 v1(24.77,27.3) ; U19.18 v2(32.6,82.55) ; U17.20 v2(68.16,38.73) ; v2(27.3,91.23) 26.4,92.13 23.54,92.13 22.85,91.44 J1.62 J1.30 J1.29 ; U19.7 v2(32.6,75.56) ; v2(58.42,111.97) U16.80 58.42,106.68 60.33,104.77 64.2,104.77 64.96,105.54 66.55,105.54 66.63,105.62 v2(68.58,105.62) ; U2.2 v2(84.67,28.58) ; v2(84.67,37.46) 82.55,37.46
  POWER w0.381: J1.29 6.35,90.02 ; J1.29 7.47,88.9 ; J1.29 5.23,88.9 ; J1.29 6.35,87.78 ; 117.48,44.57 D4.1 ; D4.1 118.62,45.72 ; D4.1 117.48,46.87 ; D4.1 116.33,45.72 ; 90.17,28.67 L2.1 ; L2.1 91.34,29.84 ; L2.1 90.17,31.02 ; L2.1 89,29.84 ; 46.38,53.98 U7.24 ; U7.24 47.62,55.22 ; U7.24 48.87,53.98 ; 99.82,50.8 D1.1 ; D1.1 100.97,49.65 ; D1.1 100.97,51.95 ; D1.1 102.11,50.8 ; D2.1 94.49,53.34 ; D2.1 93.34,54.49 ; D2.1 92.2,53.34 ; D2.1 93.34,52.19 ; 6.35,90.32 J1.30 ; J1.30 7.47,91.44 ; J1.30 5.23,91.44 ; J1.30 6.35,92.56 ; 108.59,47.11 D3.1 ; D3.1 107.44,48.26 ; D3.1 109.73,48.26 ; D3.1 108.59,49.41 ; L6.1 91.34,2.54 ; L6.1 90.17,1.37 ; L6.1 89,2.54 ; L6.1 90.17,3.71 ; J1.62 11.43,92.56 ; J1.62 10.31,91.44 ; J1.62 12.55,91.44 ; J1.62 11.43,90.32
  BOTTOM w0.381: v2(81.92,83.61) C27.1 ; C26.1 v2(81.92,97.58) ; v2(68.58,105.62) 76.41,105.62 81.39,110.6 81.39,110.78 81.73,111.12 81.91,111.12 v2(82.55,111.76) C25.1 ; v2(27.3,46.14) C11.1 ; D1.1 102.87,52.7 103.12,52.7 103.51,53.09 103.51,68 105.14,69.64 v2(106.05,69.64) C14.1 ; D1.1 100.97,52.96 100.58,53.34 D2.1 ; D1.1 107.95,50.8 108.59,50.16 D3.1 ; v2(106.05,83.61) C12.1 ; 24.77,32.04 v1(24.77,34.29) ; 24.77,32.04 30.35,32.04 v2(32.6,34.29) ; 24.77,32.04 v1(24.77,27.3) ; v2(79.38,26.88) C2.1 ; C3.1 v2(79.38,9.74) 79.59,9.74 v1(80.01,10.16) ; v2(27.3,21.38) C15.1 ; v2(27.3,91.23) C9.1 ; C28.1 v2(81.92,69.64) ; v2(106.05,97.58) C13.1 ; v2(27.3,69) C10.1 ; v2(106.05,111.55) C4.1
  vias: v2(18.84,34.29) v2(18.84,34.29) v2(18.84,27.3) v2(18.84,27.3)
A0: length 10.7
  TOP w0.203: U19.47 19.35,72.39 19.3,72.44 18.37,72.44 18.32,72.39 14.81,72.39 14.6,72.19 14.6,71.32 14.4,71.12 J1.54
A1: length 10.1
  TOP w0.203: U19.46 19.35,73.02 19.18,72.85 12.24,72.85 J1.55
A2: length 11.1
  TOP w0.203: J1.56 16.99,76.2 17.78,75.41 17.78,74.5 17.98,74.3 18.32,74.3 18.5,74.47 19.18,74.47 19.35,74.3 U19.44
A3: length 102.5
  TOP w0.203: J1.57 10.16,78.74 7.44,76.02 7.44,75.75 6.63,74.93 2.11,74.93 1.9,75.13 1.9,102.67 2.54,103.3 4.52,103.3 4.95,102.87 20.75,102.87 21.16,103.28 26.7,103.28 27.3,102.67 27.3,94.61 31.61,90.31 31.61,90.03 26.81,85.23 26.53,85.23 26.18,85.58 25.89,85.58 v1(25.4,85.09) ; v1(25.4,78.11) 25.4,75.13 25.2,74.93 U19.43
  BOTTOM w0.203: v1(25.4,78.11) v1(25.4,85.09)
A4: length 22.3
  TOP w0.203: v1(24.13,76.2) U19.41 ; J1.58 v1(15.24,81.28)
  BOTTOM w0.203: v1(24.13,76.2) 22.68,74.75 16.26,74.75 15.24,75.77 v1(15.24,81.28)
A5: length 32.3
  TOP w0.203: v1(13.33,76.83) 18.32,76.83 18.5,76.66 19.18,76.66 19.35,76.83 U19.40
  BOTTOM w0.203: J1.59 10.34,84.91 5.54,84.91 4.44,83.82 4.44,77.04 4.65,76.83 5.44,76.83 5.9,77.29 6.8,77.29 7.26,76.83 10.52,76.83 10.98,77.29 12.88,77.29 v1(13.33,76.83)
A6: length 1.9
  TOP w0.203: J1.60 v1(13.33,86.36)
  BOTTOM w0.203: v1(13.33,86.36) 13.33,86.33
A7: length 30.3
  TOP w0.203: v1(18.41,78.74) U19.37
  BOTTOM w0.203: J1.61 12.7,87.63 23.93,87.63 24.13,87.43 24.13,78.94 23.93,78.74 v1(18.41,78.74)
A8: length 21.1
  TOP w0.203: J1.13 8.73,48.26 9.52,47.46 10.29,46.7 10.81,47.22 12.05,47.22 12.47,46.81 13.67,46.81 14.15,47.29 14.15,47.96 14.45,48.26 17.69,48.26 18.5,47.45 21.55,47.45 21.85,47.75 22.28,47.75 22.58,48.05 22.58,48.53 22.11,49 21.17,49 21.17,48.95 21.12,48.89 U21.47
A9: length 27.3
  TOP w0.203: U21.46 22.37,49.53 22.58,49.74 22.58,50.38 22.47,50.48 22.28,50.29 19.88,50.29 19.58,50.59 19.58,50.65 19.55,50.61 19.18,50.98 18.5,50.98 18.03,50.5 18.03,50.06 17.32,49.35 15.88,50.8 14.13,50.8 12.93,49.6 12.93,48.61 13.74,47.79 13.74,47.46 13.5,47.22 12.64,47.22 12.57,47.28 12.23,47.62 10.63,47.62 10.29,47.28 9.93,47.64 9.93,49.6 8.73,50.8 J1.14
A10: length 48.1
  TOP w0.203: J1.15 7.9,53.34 8.71,52.53 8.71,52.07 7.9,51.25 7.44,51.25 6.8,51.89 5.9,51.89 5.26,51.25 5.26,50.35 5.9,49.71 6.8,49.71 7.44,50.35 8.61,50.35 9.52,49.43 9.52,49.12 9.12,48.71 7.44,48.71 6.8,49.35 5.9,49.35 5.26,48.71 5.26,47.81 5.9,47.17 6.8,47.17 7.44,47.81 8.31,47.81 9.94,46.17 10.34,46.17 10.98,46.81 11.88,46.81 12.57,46.13 13.57,46.13 15.29,47.85 16.94,47.85 18.16,46.63 22.73,46.63 23.11,46.25 23.11,46.48 23.58,46.96 23.81,46.96 23.39,47.37 23.39,48.98 23.55,49.13 23.55,49.99 22.47,51.06 22.21,50.8 U21.44
A11: length 24.6
  TOP w0.203: 19.55,51.19 19.58,51.15 19.58,51.18 ; 19.55,51.19 19.58,51.22 ; 19.55,51.19 19.34,50.98 19.33,50.98 19.33,51.17 18.46,51.17 18.34,51.29 18.34,50.97 17.32,49.94 15.54,51.71 13.22,51.71 12.93,51.42 12.93,50.18 12.11,49.35 10.75,49.35 9.93,50.18 9.93,51.21 9.12,52.02 9.12,54.31 9.52,54.71 9.52,55.66 9.31,55.88 J1.16 ; U21.43 20.95,51.31 19.88,51.31 19.67,51.1 19.58,51.18 ; 19.58,51.18 19.58,51.22 ; 19.58,51.22 19.58,51.26
A12: length 20.8
  TOP w0.203: J1.17 7.58,58.42 9.93,56.07 9.93,54.54 9.52,54.14 9.52,52.54 9.86,52.21 10.34,51.91 11.87,51.91 12.18,51.6 12.52,51.6 13.05,52.12 17.74,52.12 18.5,52.88 19.18,52.88 19.35,52.7 U21.41
A13: length 21
  TOP w0.203: U21.40 19.35,53.34 19.3,53.29 18.37,53.29 18.29,53.37 17.94,53.01 17.94,52.9 17.69,52.65 13.33,52.65 12.52,53.46 12.52,53.93 12.74,54.15 12.11,54.79 10.98,54.79 10.34,55.43 10.34,57.39 7.62,60.11 7.62,60.96 J1.18
A14: length 19.5
  TOP w0.203: U21.38 19.35,54.61 19.18,54.79 18.5,54.79 18.32,54.61 14.6,54.61 11.89,57.33 10.98,57.33 10.34,57.97 10.34,59.51 J1.19
A15: length 20.9
  TOP w0.203: J1.20 10.34,62.05 10.34,60.51 10.98,59.87 11.89,59.87 12.7,59.05 12.7,57.78 15.24,55.24 U21.37
A16: length 18.2
  TOP w0.203: U20.36 23.93,31.12 24.13,30.91 24.13,29.21 v1(23.49,28.58) ; v1(16.51,28.58) 15.88,27.94 J1.37
  BOTTOM w0.203: v1(23.49,28.58) 23.32,28.4 18.5,28.4 18.32,28.58 v1(16.51,28.58)
A17: length 10.3
  TOP w0.203: J1.38 16.51,30.48 17.78,31.75 18.32,31.75 18.5,31.57 19.18,31.57 19.35,31.75 U20.35
A18: length 35
  TOP w0.203: J1.39 18.32,33.02 18.5,33.2 19.18,33.2 19.35,33.02 U20.33 25.83,33.02 26.04,33.22 26.04,33.71 27.3,34.98 27.3,39.37 29.21,41.27 U7.6
A19: length 37.1
  TOP w0.203: J1.40 v1(14.6,35.56) ; v1(17.14,33.66) 18.32,33.66 18.37,33.6 19.3,33.6 19.35,33.66 U20.32 25.4,33.66 26.67,34.92 26.67,39.37 29.21,41.91 38.53,41.91 38.73,42.11 38.73,43.61 38.94,43.81 U7.5
  BOTTOM w0.203: v1(17.14,33.66) 15.24,35.56 v1(14.6,35.56)
A20: length 40.3
  TOP w0.203: v1(17.07,35) 18.31,35 18.33,34.98 19.35,34.98 19.4,34.92 U20.30 25.83,34.92 26.04,35.13 26.04,39.8 26.24,40 26.67,40 29.03,42.37 36.02,42.37 37.47,43.81 37.47,45.72 38.1,46.35 U7.4 ; v1(17.07,38.1) J1.41
  BOTTOM w0.203: v1(17.07,38.1) v1(17.07,35)
A21: length 51.8
  TOP w0.203: J1.42 12.5,40.64 12.7,40.84 12.7,41.71 12.5,41.91 10.36,41.91 10.16,41.71 10.16,39.36 10.34,39.18 10.34,37.65 10.57,37.42 10.57,36.24 10.34,36.01 10.34,35.11 11.15,34.29 15.18,34.29 16.45,35.56 18.32,35.56 18.5,35.38 19.18,35.38 19.35,35.56 U20.29 25.2,35.56 25.4,35.76 25.4,40 26.67,41.27 27.3,41.27 28.8,42.77 34.95,42.77 36.2,44.02 36.2,46.35 38.73,48.89 U7.3
A22: length 47.9
  TOP w0.203: U7.2 35.56,51.43 34.29,50.16 34.29,46.35 33.27,45.33 26.28,45.33 24.13,43.18 24.13,40.18 20.72,40.18 ; J1.43 13.28,43.18 16.28,40.18 20.72,40.18 ; U20.27 19.35,36.83 19.18,37.01 17.96,37.01 17.78,36.83 17.49,36.83 17.32,37 17.32,37.49 17.68,37.85 17.68,38.63 18.41,39.37 19.91,39.37 20.72,40.18
A23: length 54.4
  TOP w0.203: U20.26 24.56,37.46 24.77,37.67 v1(24.77,38.73) 24.77,42.55 25.4,43.18 32.38,43.18 35.56,46.35 35.56,48.89 36.6,49.94 40.44,49.94 40.84,49.53 41.91,49.53 42.55,50.16 42.55,52.7 41.27,53.98 U7.1 ; J1.44 12.7,45.72 17.14,41.27 v1(23.49,41.27)
  BOTTOM w0.203: v1(23.49,41.27) 23.49,39.31 24.07,38.73 v1(24.77,38.73)
AEN/: length 37.8
  BOTTOM w0.203: U7.8 38.1,36.2 33.66,40.64 25.6,40.64 25.4,40.84 25.4,41.91 24.13,43.18 22.77,43.18 18.03,47.92 18.03,48.65 15.88,50.8 15.88,52.7 15.24,53.34 J1.47
BD8: length 7.6
  TOP w0.203: U20.2 38.1,24.13
BD9: length 7.4
  TOP w0.203: U20.3 32.08,24.77 32.26,24.59 36.65,24.59 37.47,25.4
BRD/: length 123.1
  TOP w0.203: U16.73 68.04,106.81 68.07,106.84 v1(74.77,106.84)
  BOTTOM w0.203: U7.15 48.67,31.12 49.3,30.48 68.58,30.48 70.48,32.38 70.48,54.61 71.12,55.24 74.09,55.24 74.3,55.45 74.3,104.66 73.83,105.13 69.24,105.13 68.92,104.81 68.24,104.81 67.77,105.28 67.77,105.96 68.24,106.43 68.92,106.43 69.24,106.12 74.05,106.12 v1(74.77,106.84)
D0: length 16.2
  TOP w0.203: U19.26 17.14,85.72 15.24,87.63 12.28,87.63 12.05,87.86 10.81,87.86 10.58,87.63 7.62,87.63 J1.28
D1: length 21.9
  TOP w0.203: U19.27 19.35,85.09 19.18,85.27 12.31,85.27 12.11,85.47 12.11,85.49 12.57,85.95 13.51,85.95 13.74,86.19 13.74,86.53 13.51,86.77 12.57,86.77 11.88,87.45 10.98,87.45 10.34,86.81 10.34,85.91 10.63,85.61 10.63,85.47 10.43,85.27 7.8,85.27 J1.27
D2: length 16.9
  TOP w0.203: J1.26 9.52,84.45 10.52,84.45 10.98,84.91 11.88,84.91 12.34,84.45 17.82,84.45 18.03,84.25 18.03,84.12 18.5,83.64 19.18,83.64 19.35,83.82 U19.29
D3: length 55.7
  TOP w0.203: J1.25 5.26,78.74 5.08,78.92 5.08,92.51 5.28,92.71 28.63,92.71 29.21,92.13 29.21,88.47 29.01,88.27 23.7,88.27 23.49,88.06 23.49,84.1 22.58,83.19 U19.30
D4: length 17.1
  TOP w0.203: J1.24 10.16,80.01 15.24,80.01 16.69,81.46 19.13,81.46 19.58,81.91 U19.32
D5: length 95.2
  TOP w0.203: U19.33 24.13,81.28 24.77,81.91 24.77,83.88 25.71,84.83 26.98,84.83 32.16,90 32.16,90.34 28.92,93.57 30.07,93.57 30.25,93.75 30.25,95.48 30.07,95.66 28.35,95.66 28.17,95.48 27.93,95.48 27.71,95.7 27.71,102.84 26.87,103.68 20.99,103.68 20.58,103.28 5.12,103.28 4.69,103.71 2.17,103.71 1.27,102.81 1.27,74.3 1.9,73.66 J1.23
D6: length 110.6
  TOP w0.203: v1(8.89,29.84) 8.89,24.51 8.69,24.31 7.44,24.31 J1.4 5.28,25.4 5.08,25.2 5.08,16.08 5.28,15.88 24.56,15.88 24.77,16.08 24.77,23.93 24.56,24.13 U20.47 ; v1(6.35,71.12) 6.35,71.75 8.25,73.66 8.25,76.2 9.52,77.47 16.94,77.47 17.14,77.67 17.14,78.74 18.24,79.83 19.18,79.83 19.35,80.01 U19.35 ; v1(19.68,56.52) U21.35
  BOTTOM w0.203: v1(19.68,56.52) 19.05,55.88 18.79,55.88 17.7,56.97 9.98,56.97 8.89,55.88 v1(8.89,29.84)
D7: length 110.6
  TOP w0.203: U19.36 25.83,79.38 26.04,79.17 26.04,67.51 25.83,67.31 20.9,67.31 21.76,66.45 33.48,66.45 33.88,66.85 33.88,69.81 34.15,70.08 34.15,73.87 33.88,74.13 33.88,81.81 36.63,84.56 38.56,84.56 38.91,84.2 38.91,82.42 38.56,82.07 37.42,82.07 36.6,81.25 36.6,77.94 34.7,76.03 34.7,74.47 34.96,74.21 34.96,66.77 33.83,65.63 21.42,65.63 19.34,67.72 17.92,67.72 17.75,67.54 12.63,67.54 12.52,67.43 12.52,65.59 11.88,64.95 9.98,64.95 J1.21
D9: length 48.6
  TOP w0.203: U20.46 25.2,24.77 25.4,24.56 25.4,15.88 24.81,15.29 4.6,15.29 4.44,15.44 4.44,27.74 4.65,27.94 J1.5
D10: length 56
  TOP w0.203: J1.6 4.01,30.48 3.81,30.28 3.81,15.08 4.01,14.88 25.83,14.88 26.04,15.08 26.04,25.83 25.83,26.03 U20.44
D11: length 20.4
  TOP w0.203: J1.7 7.44,31.93 9.55,31.93 9.75,31.72 9.75,26.87 10.13,26.49 19.18,26.49 19.35,26.67 U20.43
D12: length 64.9
  TOP w0.203: J1.8 4.44,35.56 3.17,34.29 3.17,14.68 3.38,14.47 26,14.47 26.44,14.91 26.44,27.28 26.47,27.3 25.83,27.94 U20.41
D13: length 29.4
  TOP w0.203: 21.08,28.58 22.66,28.58 22.86,28.78 v1(22.86,30.48) ; J1.9 7.44,37.01 9.12,37.01 9.52,36.6 9.52,34.76 9.75,34.54 9.75,33.25 v1(9.52,33.02)
  BOTTOM w0.203: v1(22.86,30.48) 20.14,33.2 19.65,32.71 19.65,31.78 18.58,30.71 18.25,30.71 15.76,33.2 12.7,33.2 12.52,33.02 12.52,32.57 11.88,31.93 10.62,31.93 v1(9.52,33.02)
D14: length 25.6
  TOP w0.203: U20.38 19.35,29.84 19.18,30.02 15.99,30.02 15.17,29.21 10.36,29.21 10.16,29.41 10.16,34.71 9.93,34.94 9.93,36.18 10.16,36.41 10.16,37.25 9.93,37.48 9.93,39.01 9.75,39.19 7.8,39.19 J1.10
D15: length 22.1
  TOP w0.203: U20.37 19.05,30.48 v1(18.41,31.12) ; J1.11 8.38,43.18 9.75,41.81 v1(9.75,41.5)
  BOTTOM w0.203: v1(9.75,41.5) 9.75,38.23 10.98,37.01 12.52,37.01 v1(18.41,31.12)
DDIR: length 8.3
  TOP w0.203: U20.1 38.73,23.49
DEN/: length 152.1
  TOP w0.203: U20.48 v1(24.13,23.49) ; U7.20 41.91,43.81 41.27,43.18 41.27,40.64 40.87,40.23 39.57,40.23 39.17,40.64 29.21,40.64 28.57,40 v1(28.57,38.73) ; v1(17.78,86.36) U19.25
  BOTTOM w0.203: v1(17.78,86.36) 17.14,87 12.96,87 12.76,86.79 12.76,86.65 12.73,86.61 12.73,86.11 13.74,85.09 13.74,76.66 12.76,75.68 12.76,63.15 17.66,58.24 19.18,58.24 19.35,58.42 20.12,58.42 20.32,58.22 20.32,55.45 20.12,55.24 17.98,55.24 17.78,55.45 17.78,56.31 17.58,56.52 14.17,56.52 13.97,56.31 13.97,54.61 13.77,54.41 11.91,54.41 11.88,54.43 11.18,54.43 9.83,55.78 9.63,55.78 9.52,55.68 9.52,44.65 9.73,44.45 18.21,44.45 19.68,42.98 19.68,39.57 19.89,39.37 22.86,39.37 24.13,38.1 28.57,38.1 ; v1(24.13,23.49) 28.37,23.49 28.57,23.7 28.57,30.73 29.39,31.55 30.55,31.55 32.48,33.48 32.93,33.48 33.41,33.95 33.41,34.63 32.93,35.1 32.26,35.1 31.78,34.63 31.78,34.18 30.14,32.54 29.39,32.54 28.57,33.35 28.57,38.1 ; 28.57,38.1 v1(28.57,38.73)
MCLK: length 52.6
  TOP w0.203: J1.52 9.52,66.04 7.44,68.12 9.55,68.12 10.19,67.49 11.88,67.49 12.34,67.95 17.58,67.95 17.78,68.15 19.48,68.15 21.59,66.04 33.66,66.04 34.29,66.67 34.29,69.64 34.56,69.91 34.56,74.04 34.29,74.3 34.29,76.2 36.2,78.11 36.2,83.26 36.88,83.95 U16.31
MRD/: length 36.7
  BOTTOM w0.203: U7.9 34.29,39.37 33.66,39.37 33.02,40 24.97,40 24.77,40.21 24.77,41.91 24.13,42.55 22.83,42.55 17.62,47.75 17.62,47.79 14.6,50.8 J1.46
MWR/: length 37.2
  TOP w0.203: J1.45 12.7,48.26 v1(13.33,47.62)
  BOTTOM w0.203: v1(13.33,47.62) 16.51,47.62 22.23,41.91 23.72,41.91 24.13,41.5 24.13,39.57 24.33,39.37 32.48,39.37 33.41,38.44 33.41,37.71 U7.10
N00036_6360: length 20.5
  TOP w0.203: L6.2 v1(100.33,2.54)
  BOTTOM w0.203: v1(100.33,2.54) 100.33,12.7 100.97,13.34 R4.1 102.87,16.51 R3.1
N00038_6372: length 17.2
  TOP w0.203: v1(80.64,13.46) 81.15,13.97 U1.4 85.09,13.97 87.63,11.43 v1(87.63,8.89)
  BOTTOM w0.203: C21.1 79.88,12.7 v1(80.64,13.46) ; L3.2 v1(87.63,8.89)
N00044_6366: length 41.4
  TOP w0.203: U6.1 108.83,11.43 109.36,11.96 109.36,12.11 111.12,13.88 111.12,15.88 110.49,16.51 105.41,16.51 104.78,15.88 104.78,11.48 104.11,10.81 101.84,10.81 101.47,11.17 101.47,11.69 101.84,12.05 104.08,12.05 104.47,12.44 104.47,12.96 104.08,13.35 101.84,13.35 101.47,13.71 101.47,15.5 101.84,15.86 103.52,15.86 101.7,17.68 U23.2
N00048_6359: length 6.1
  TOP w0.203: U6.2 107.31,12.7 v1(106.68,13.34)
  BOTTOM w0.203: v1(106.68,13.34) 106.68,16.43 106.27,16.84 R3.2
RA4: length 63.5
  TOP w0.203: U11.32 102.87,70.56 102.26,71.17 102.26,80.52 102.87,81.13 U10.32 102.26,81.91 101.76,82.42 101.76,83.34 101.17,83.92 99.31,83.92 98.72,83.34 94.69,83.34 94.23,83.79 93.73,83.79 93.56,83.96 93.56,84.56 93.15,84.96 92.46,84.96 92.1,85.32 92.1,87.4 93.68,88.98 98.55,88.98 99.95,87.58 100.53,87.58 102.87,89.92 U3.32 102.87,98.5 102.26,99.11 102.26,101.55 102.87,102.16 U4.32
RA5: length 77.8
  TOP w0.203: U11.31 104.14,70.74 103.53,71.35 103.53,73.43 104.14,74.04 104.14,79.03 104.99,79.88 105.63,80.52 106.93,80.52 107.29,80.87 107.29,82.96 106.86,83.39 106.86,83.95 106.38,84.42 105.71,84.42 105.23,83.95 105.23,83.46 ; 105.23,83.46 105.05,83.64 104.75,83.64 104.55,83.43 104.55,81.74 104.31,81.51 104.14,81.68 U10.31 ; 105.23,83.46 105.23,83.31 105.16,83.31 104.8,82.96 104.8,80.87 104.81,80.86 104.65,80.7 104.57,80.7 104.39,80.52 103.89,80.52 103.71,80.7 103.63,80.7 103.47,80.86 103.48,80.87 103.48,82.96 103.12,83.31 102.92,83.31 102.92,83.74 101.93,83.74 101.34,84.33 99.14,84.33 98.55,83.74 97.03,83.74 96.44,84.33 95.91,84.33 95.91,84.74 95.6,85.05 95.5,84.96 95,84.96 94.64,85.32 94.64,87.4 95,87.76 95.5,87.76 95.6,87.67 96.1,88.16 96.79,88.16 97.2,88.57 98.38,88.57 99.21,87.74 99.21,87.17 101.45,87.17 101.45,87.92 102.1,88.57 103.9,88.57 104.14,88.81 U3.31 104.14,98.68 103.53,99.29 103.53,101.37 104.14,101.98 U4.31
RA6: length 106.6
  TOP w0.203: U4.30 105.41,101.98 104.8,101.37 104.8,97.28 105.41,96.67 U3.30 105.41,89.43 104.56,88.59 104.56,94.66 104.75,94.84 104.75,96.93 104.39,97.28 103.89,97.28 103.53,96.93 103.53,94.84 103.73,94.64 103.73,89.43 103.28,88.98 103.28,88.57 102.1,88.57 101.45,87.92 101.45,87.17 99.21,87.17 99.21,87.74 98.38,88.57 97.2,88.57 96.79,88.16 96.1,88.16 95.69,87.76 95,87.76 94.59,87.35 94.59,87.4 94.23,87.76 93.73,87.76 93.37,87.4 93.37,85.32 93.73,84.96 94.23,84.96 94.59,85.32 94.59,85.37 95,84.96 95.91,84.96 95.91,84.33 96.44,84.33 97.03,83.74 98.55,83.74 99.14,84.33 101.34,84.33 101.93,83.74 102.92,83.74 102.92,83.31 103.28,83.31 103.28,83.16 103.48,82.96 103.48,80.87 103.18,80.57 103.64,80.11 104.64,80.11 105.41,80.88 U10.30 105.41,82.7 105.26,82.85 105.26,82.85 104.95,83.16 104.95,83.11 104.8,82.96 104.8,81.42 104.75,81.37 104.75,80.87 104.39,80.52 103.89,80.52 103.53,80.87 103.53,82.96 104.14,83.57 104.14,83.6 105.36,84.83 106.55,84.83 107.26,84.12 107.26,83.74 107.7,83.31 108.2,83.31 108.56,82.96 108.56,80.87 107.8,80.11 105.8,80.11 105.41,79.72 105.41,74.04 104.8,73.43 104.8,69.34 105.41,68.73 U11.30
RA9: length 29
  TOP w0.203: U4.22 115.57,103.3 114.96,102.69 114.96,98.68 115.57,98.07 U3.22 115.57,88.01 114.96,87.4 114.96,85.32 115.57,84.71 U10.22
RA10: length 82.8
  TOP w0.203: v1(73.66,103.61) 74.73,103.61 74.93,103.4 74.93,103.2 74.73,103 U16.70 ; U4.21 116.84,103.3 116.23,102.69 116.23,96.49 U3.21 116.84,88.01 116.23,87.4 116.23,85.32 116.84,84.71 U10.21 ; U9.21 92.71,112.83 92.51,113.03 v1(85.09,113.03)
  BOTTOM w0.203: v1(73.66,103.61) 73.66,104.43 73.37,104.72 69.41,104.72 69.09,104.4 68.07,104.4 67.36,105.11 67.36,106.13 68.07,106.84 69.09,106.84 69.41,106.52 73.09,106.52 73.66,107.09 73.66,112.39 74.93,113.66 84.45,113.66 v1(85.09,113.03)
RA11: length 137.2
  TOP w0.203: U10.20 118.11,84.1 118.75,84.73 118.75,87.38 118.11,88.01 U3.20 118.11,97.28 118.75,97.92 118.75,107.82 118.11,108.46 U4.20 ; U13.20 93.98,97.28 93.78,97.49 v1(93.78,98.63) ; U16.71 83.31,104.27 v1(83.82,104.77) ; v1(93.98,70.48) U12.20 ; v1(93.98,113.66) U9.20 ; v1(93.98,83.19) U8.20 ; v1(118.11,70.48) U11.20
  BOTTOM w0.203: v1(118.11,70.48) 117.72,70.87 108.88,70.87 108.49,70.48 v1(93.98,70.48) v1(93.98,83.19) 93.78,83.39 v1(93.78,98.63) 93.78,104.77 ; 93.78,104.77 v1(83.82,104.77) ; 93.78,104.77 93.98,104.98 v1(93.98,113.66)
RA12: length 82.3
  TOP w0.203: U9.19 95.25,113.26 94.23,114.27 65.38,114.27 63.5,112.39 U16.76 ; U4.19 119.38,108.58 120.02,107.95 120.02,97.48 119.38,96.84 U3.19 119.38,88.01 119.99,87.4 119.99,84.71 119.38,84.1 U10.19 119.38,74.04 118.77,73.43 118.77,70.74 119.38,70.13 U11.19
RA13: length 86
  TOP w0.203: U4.18 120.65,109.07 121.28,108.43 121.28,97.31 120.65,96.67 U3.18 120.65,87.89 120.79,87.76 120.9,87.76 121.26,87.4 121.26,83.31 120.65,82.7 U10.18 120.65,74.04 120.04,73.43 120.04,70.74 120.65,70.13 U11.18 ; U16.77 62.23,113.46 63.45,114.68 95.3,114.68 96.52,113.46 U9.18
RA14: length 121.4
  TOP w0.203: U4.15 120.65,97.54 120.02,96.9 120.02,87.95 120.65,87.32 U3.15 120.65,83.57 120.02,82.93 119.63,83.31 119.13,83.31 118.77,82.96 118.77,79.55 117.96,78.74 114.55,78.74 112.42,80.87 112.42,82.91 110.48,84.84 107.82,84.84 107.34,85.32 107.34,87.4 106.98,87.76 105.16,87.76 104.8,87.4 104.8,85.32 104.44,84.96 103.89,84.96 103.71,85.14 103.48,85.14 103.3,84.96 97.13,84.96 96.52,85.57 U13.15 ; U10.15 120.65,71.6 121.26,70.99 121.26,65.58 120.65,64.97 U11.15 ; U9.15 96.52,106.68 95.89,107.31 92.36,107.31 92.05,107.62 92.05,110.9 91.69,111.25 91.29,111.66 87.78,111.66 87.38,111.25 87.02,110.9 87.02,108.81 87.38,108.46 87.38,108.24 86.27,107.14 75.05,107.14 74.94,107.25 68.26,107.25 68.04,107.47 65.06,107.47 64.9,107.31 62.79,107.31 60.96,109.14 U16.78
RA15: length 69.9
  TOP w0.203: U3.14 119.38,87.32 118.77,87.93 118.77,96.93 119.38,97.54 U4.14 ; U16.79 59.69,107.31 60.81,106.2 68.01,106.2 68.24,106.43 68.92,106.43 68.95,106.4 86.14,106.4 88.29,108.55 88.29,110.9 88.65,111.25 90.42,111.25 90.78,110.9 90.78,108.81 88.65,106.68 94.62,106.68 95.25,106.05 U9.14
RD0: length 59.6
  TOP w0.203: U16.81 57.15,106.68 60.33,103.5 64.15,103.5 64.82,104.18 64.82,104.69 65.06,104.93 65.23,104.76 65.23,104.01 65.58,103.66 67.51,103.66 67.72,103.86 69.11,103.86 69.36,103.61 v1(72.92,103.61) ; v1(86.36,112.39) U9.26
  BOTTOM w0.203: v1(72.92,103.61) 72.22,104.31 69.58,104.31 69.26,104 67.9,104 66.95,104.94 66.95,106.3 67.9,107.25 69.26,107.25 69.58,106.93 72.11,106.93 72.92,107.74 72.92,112.29 74.7,114.07 85.29,114.07 86.36,113 v1(86.36,112.39)
RD1: length 45.2
  TOP w0.203: U16.82 55.88,106.68 60.33,102.23 64.41,102.23 64.82,102.64 64.82,103.6 64.85,103.63 64.91,103.63 65.23,103.31 65.23,102.57 65.41,102.39 67.69,102.39 67.89,102.59 68.41,102.59 68.67,102.34 77.41,102.34 78.13,103.05 84.15,103.05 90.17,109.07 U9.23
